# Altium PCB PCB3.0.PcbDoc (part 1 of 4)
Units mm, origin at the board's own origin, x right, y up, seen from the top; angles counter-clockwise.
Board outline 152.4 x 101.6 mm, 4 copper layers (Top Layer, Mid-Layer 1, Mid-Layer 2, Bottom Layer); 260 components, 503 nets, 1711 pads, 919 vias.
Unrouted connection lines stored in the file: 79.
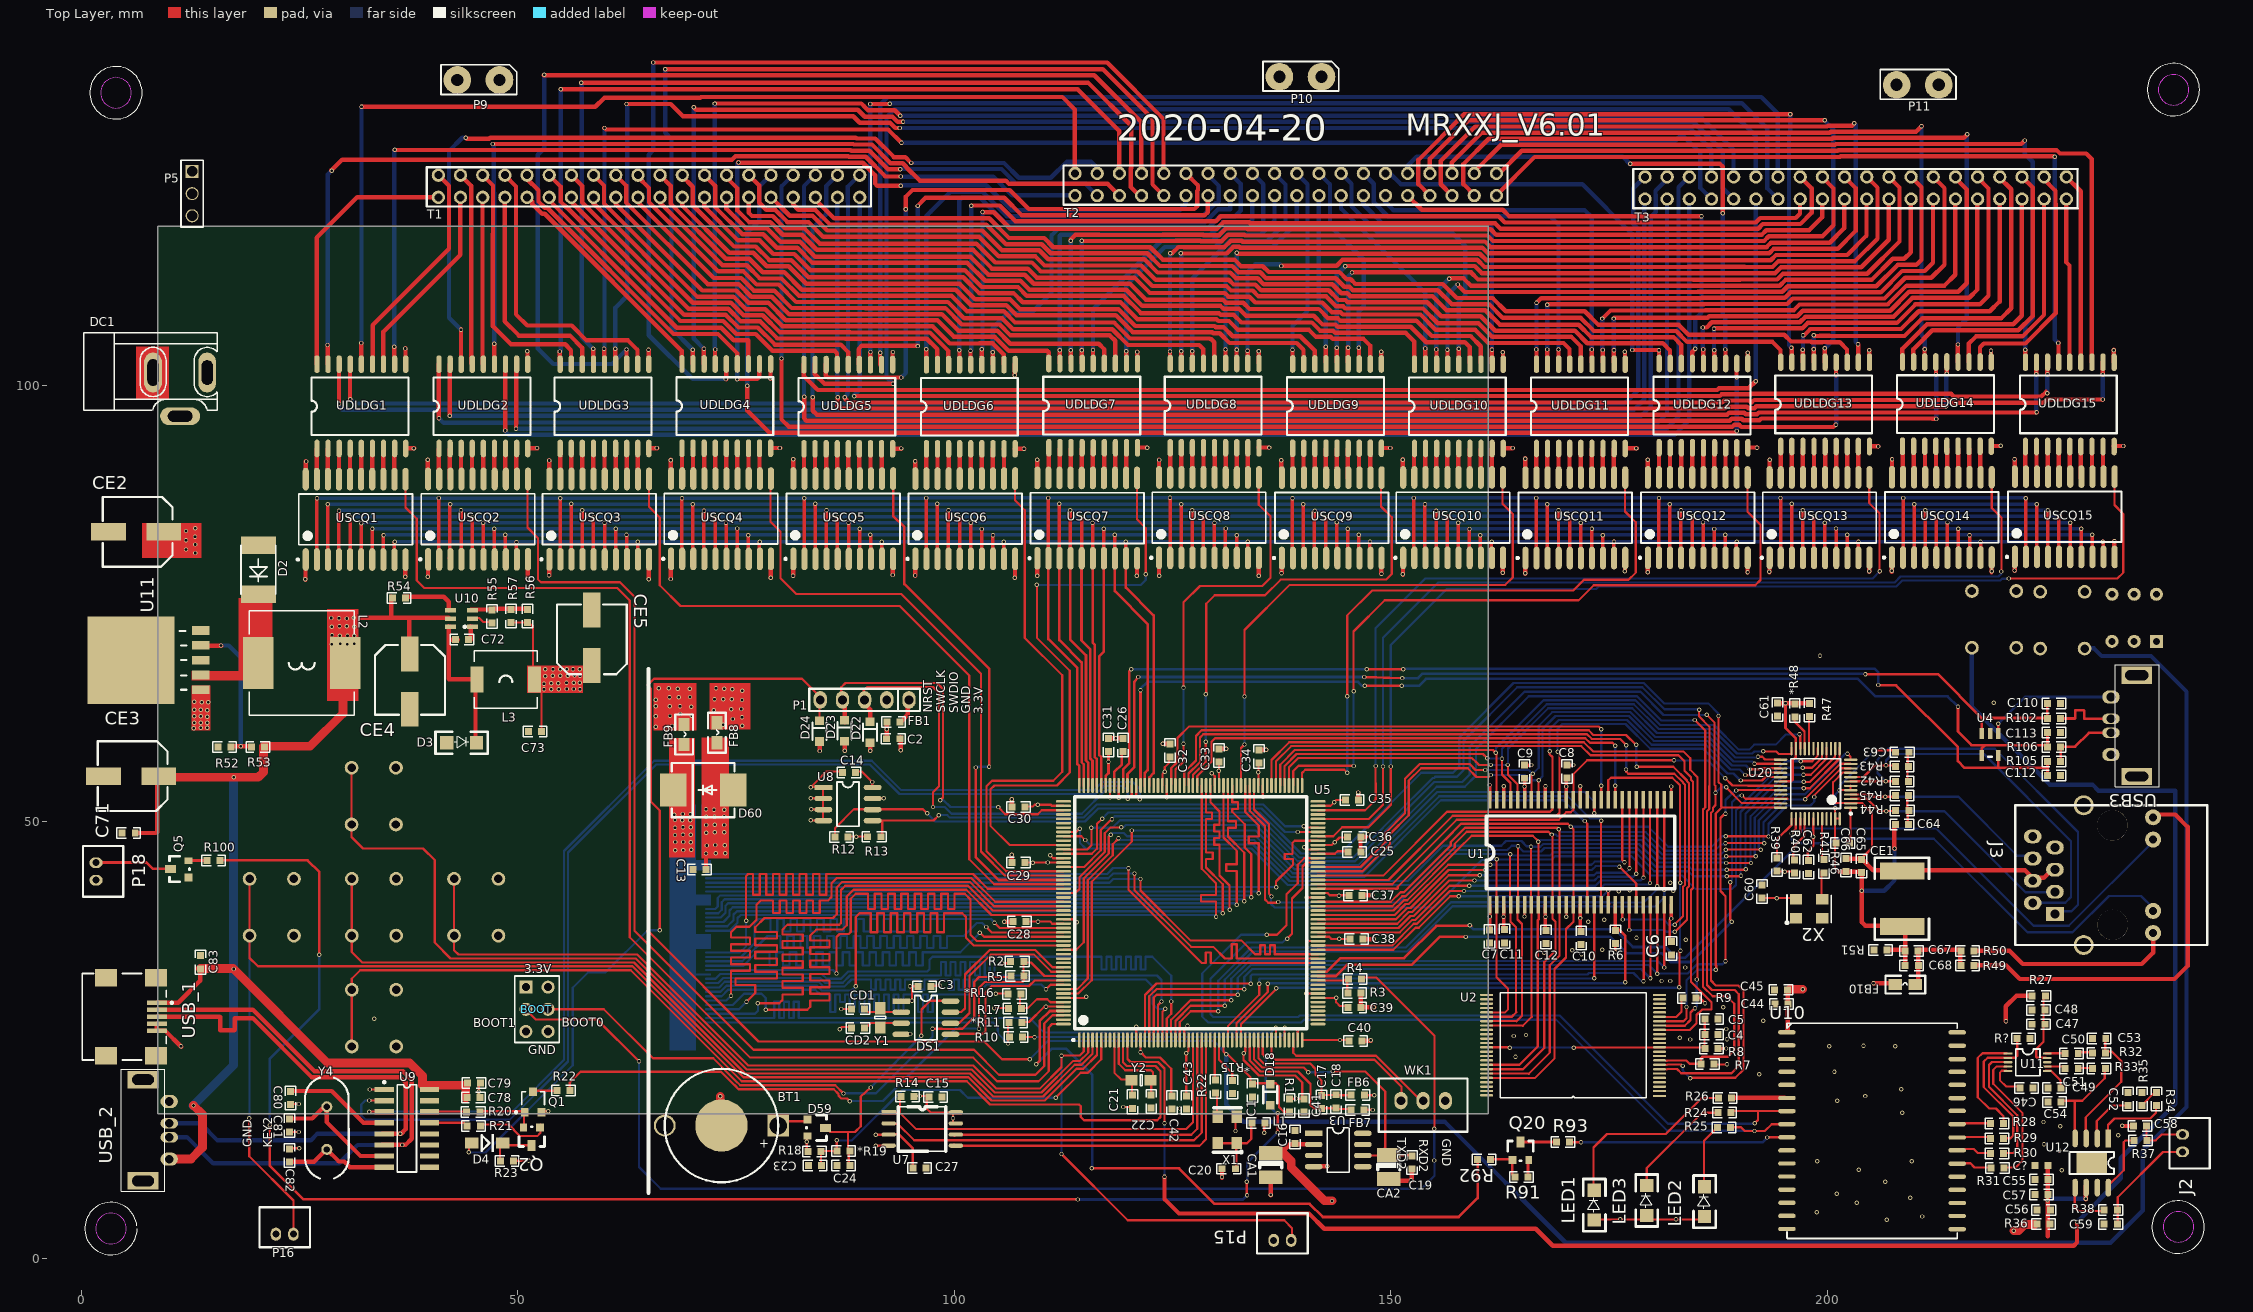
[diagram p0: Top Layer view]
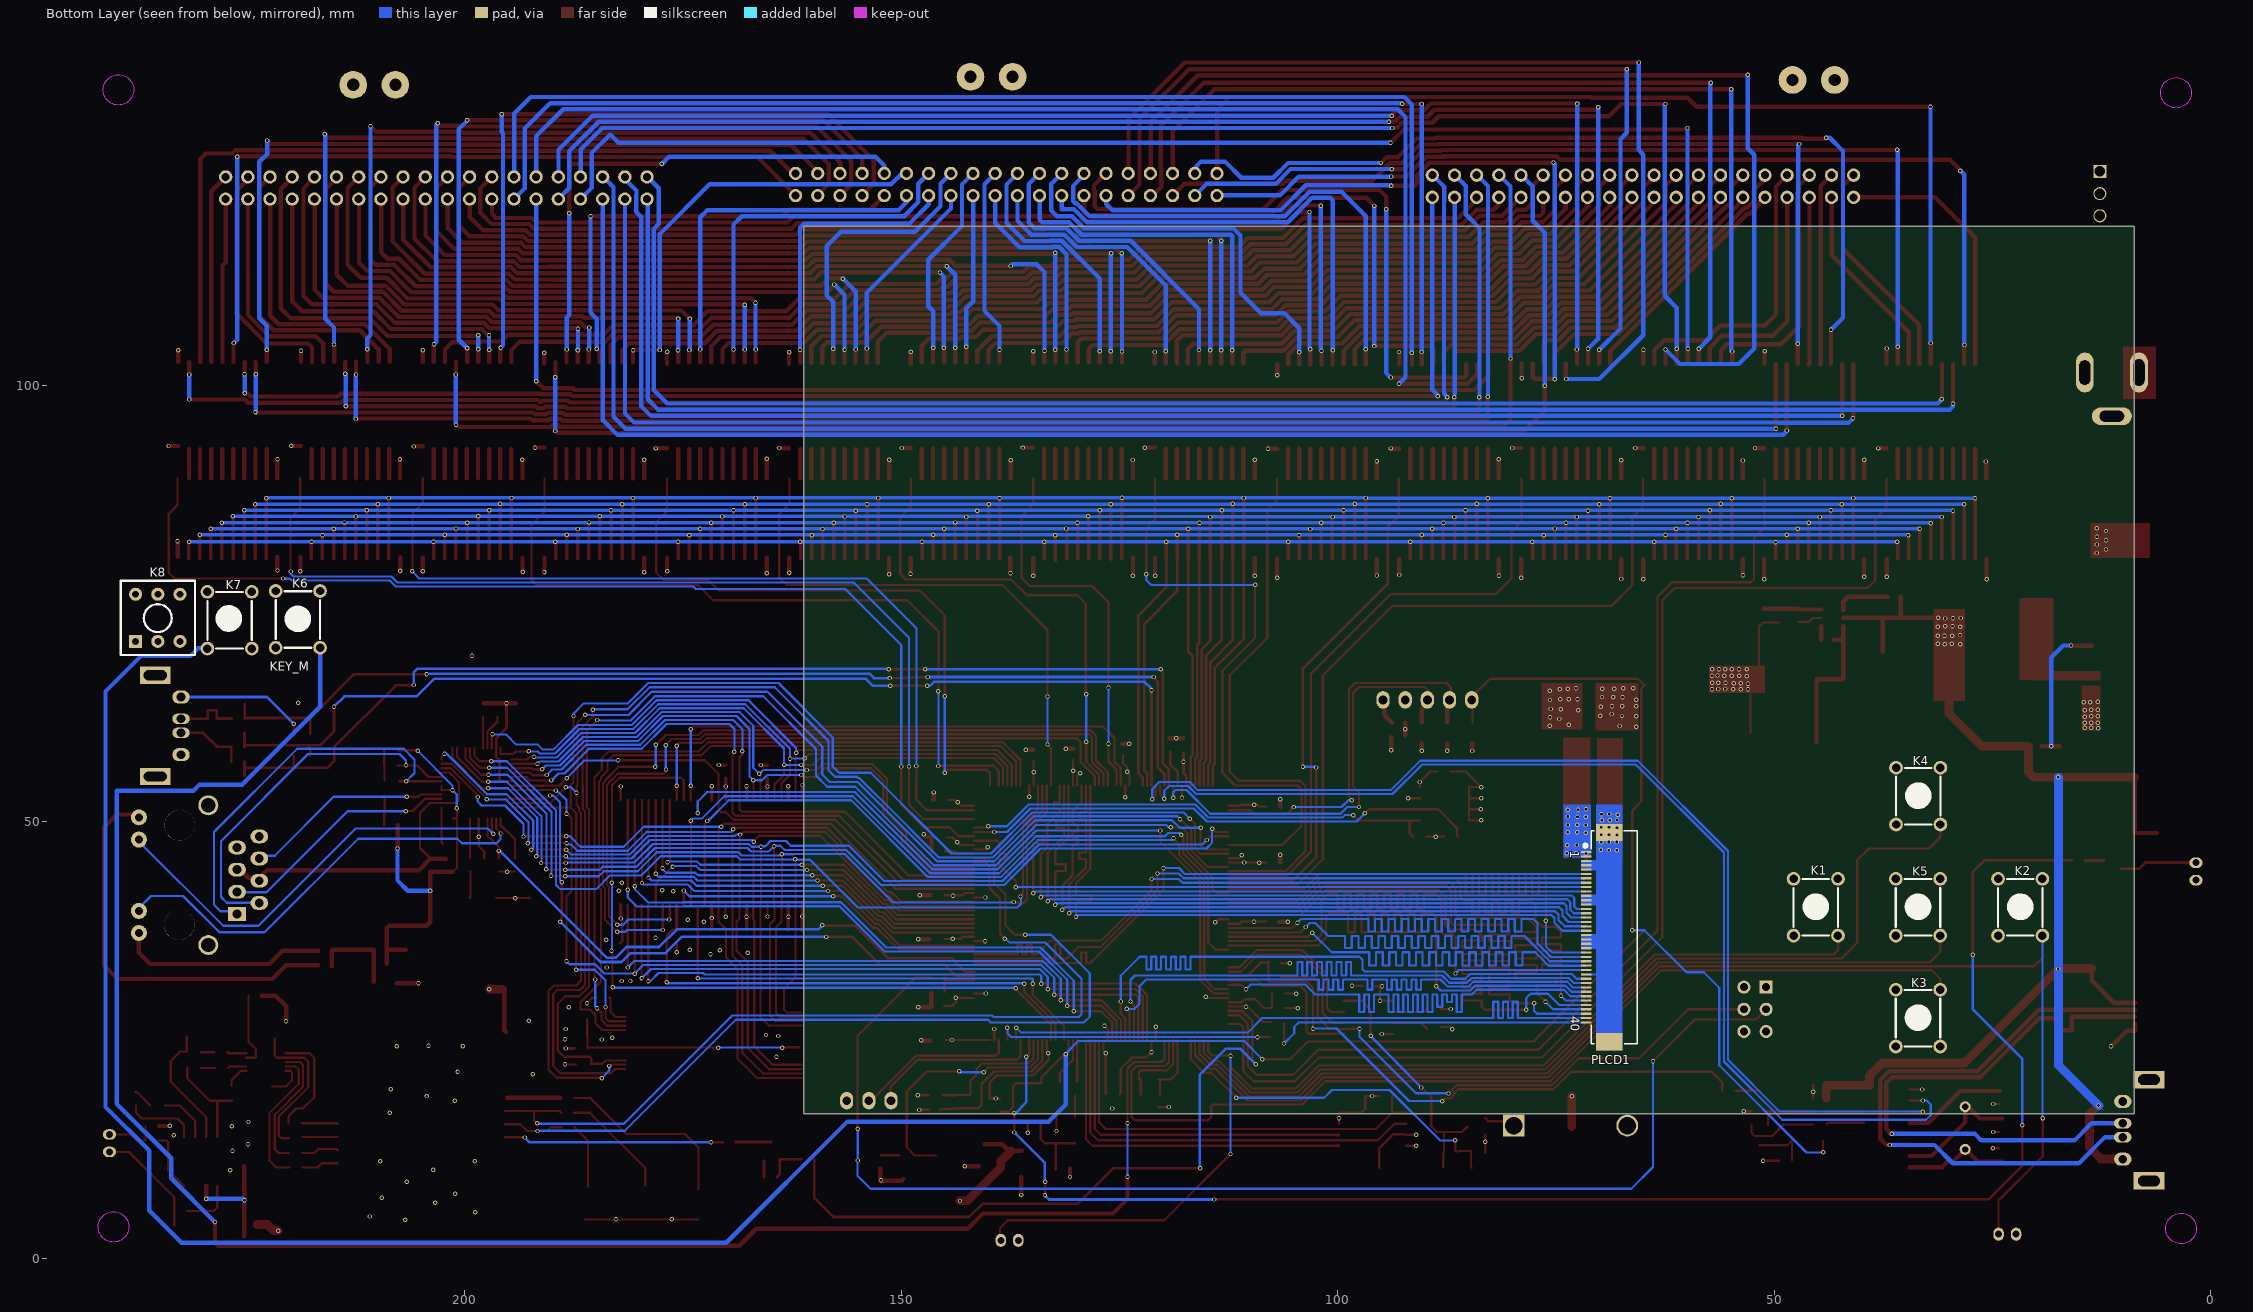
[diagram p1: Bottom Layer view, seen from below]
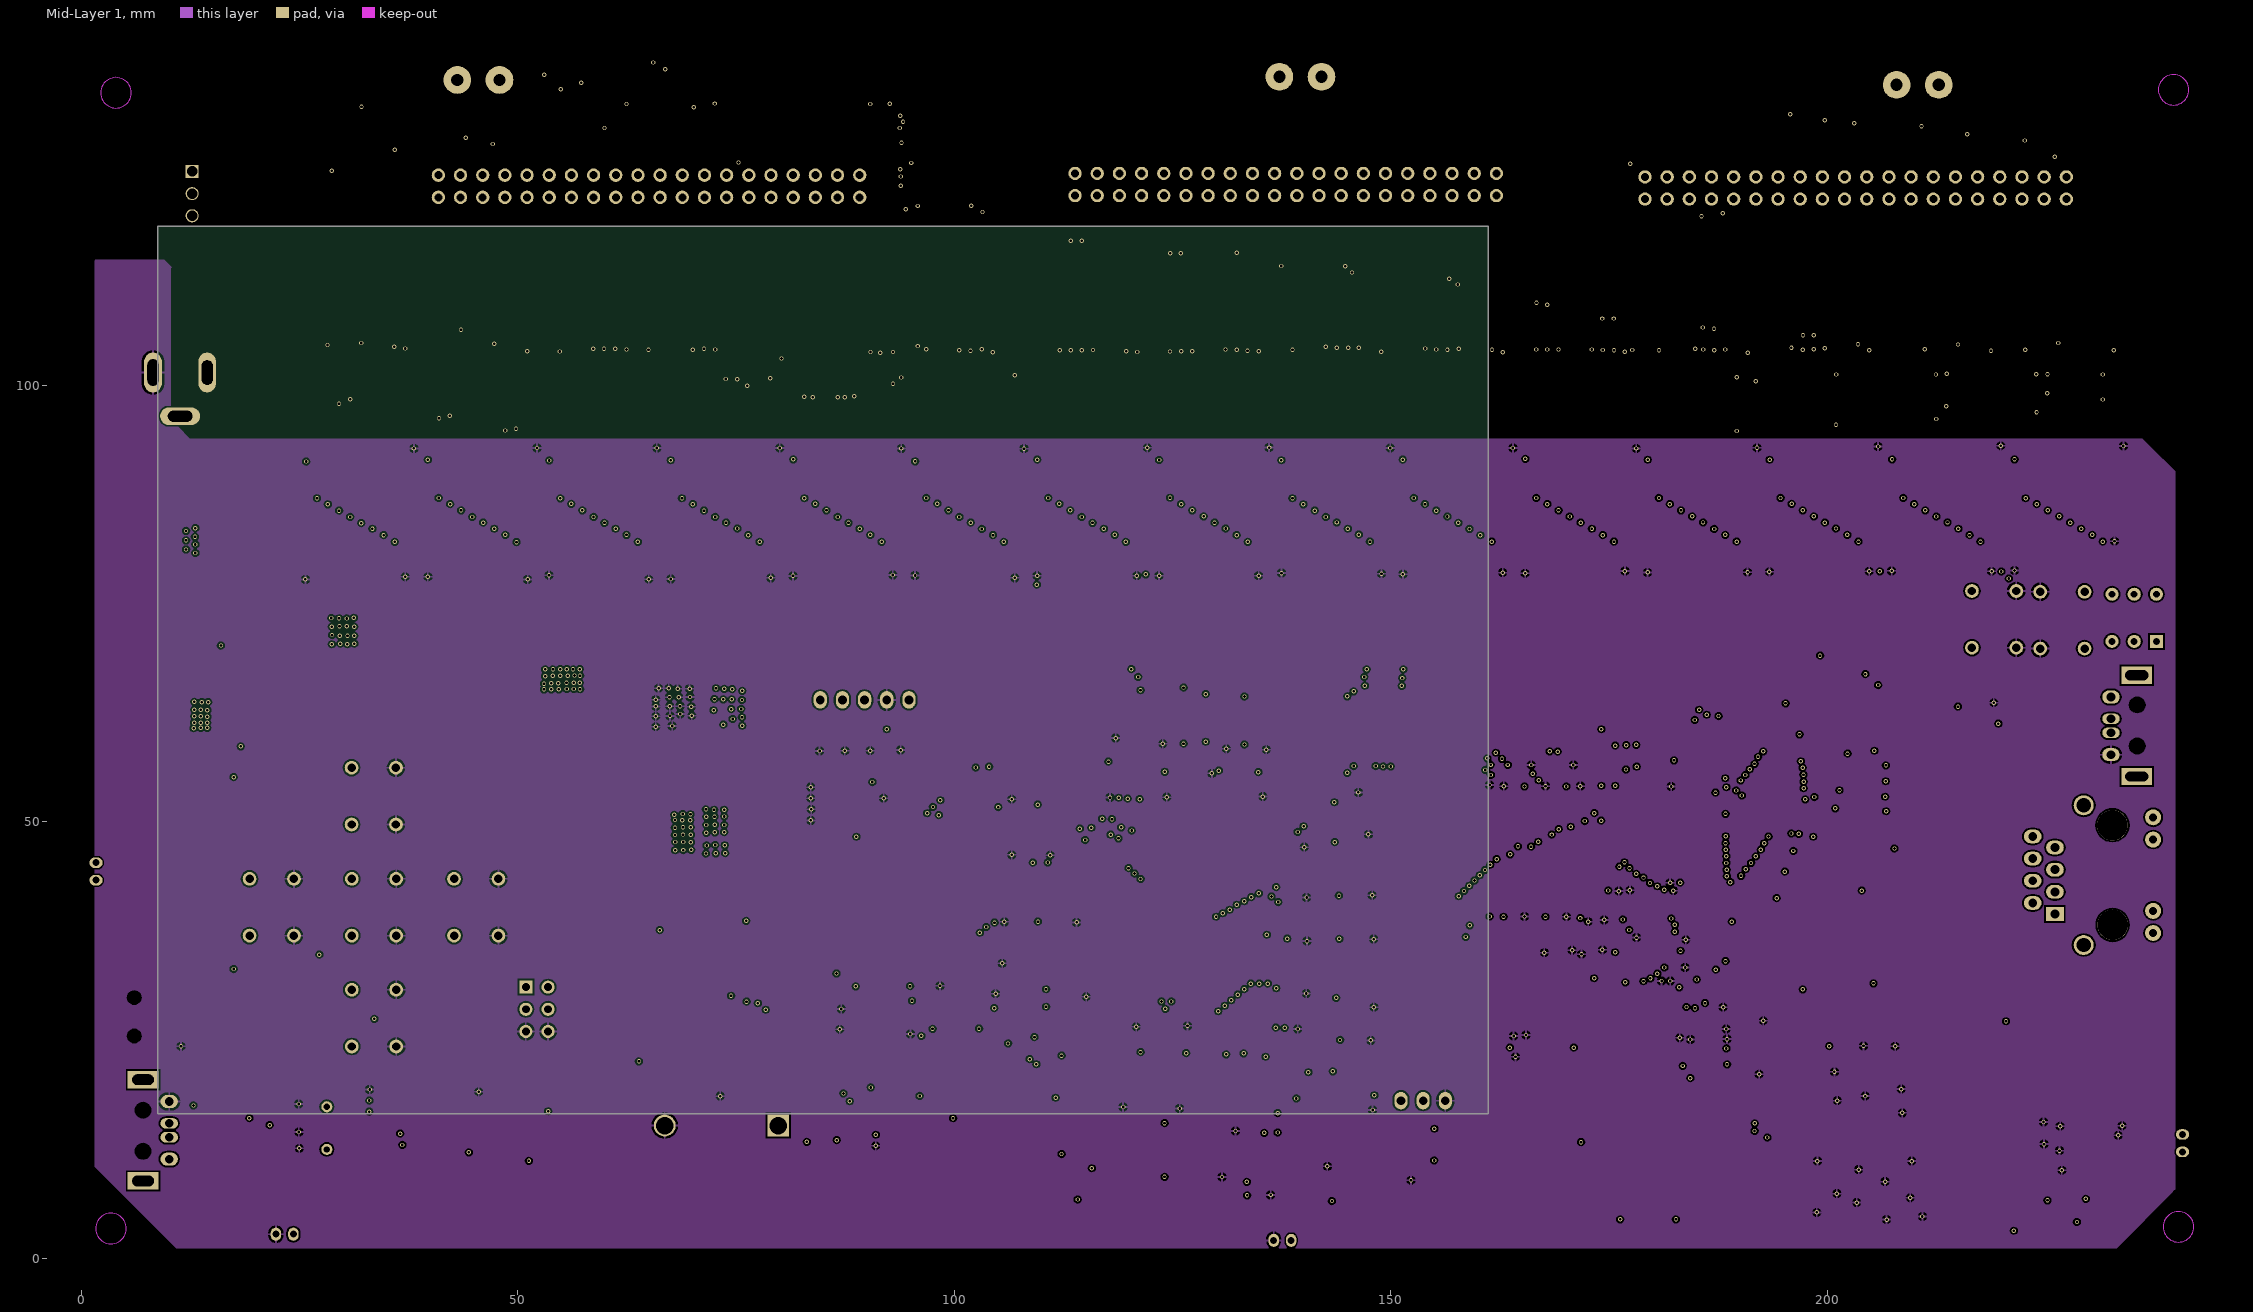
[diagram p2: Mid-Layer 1]
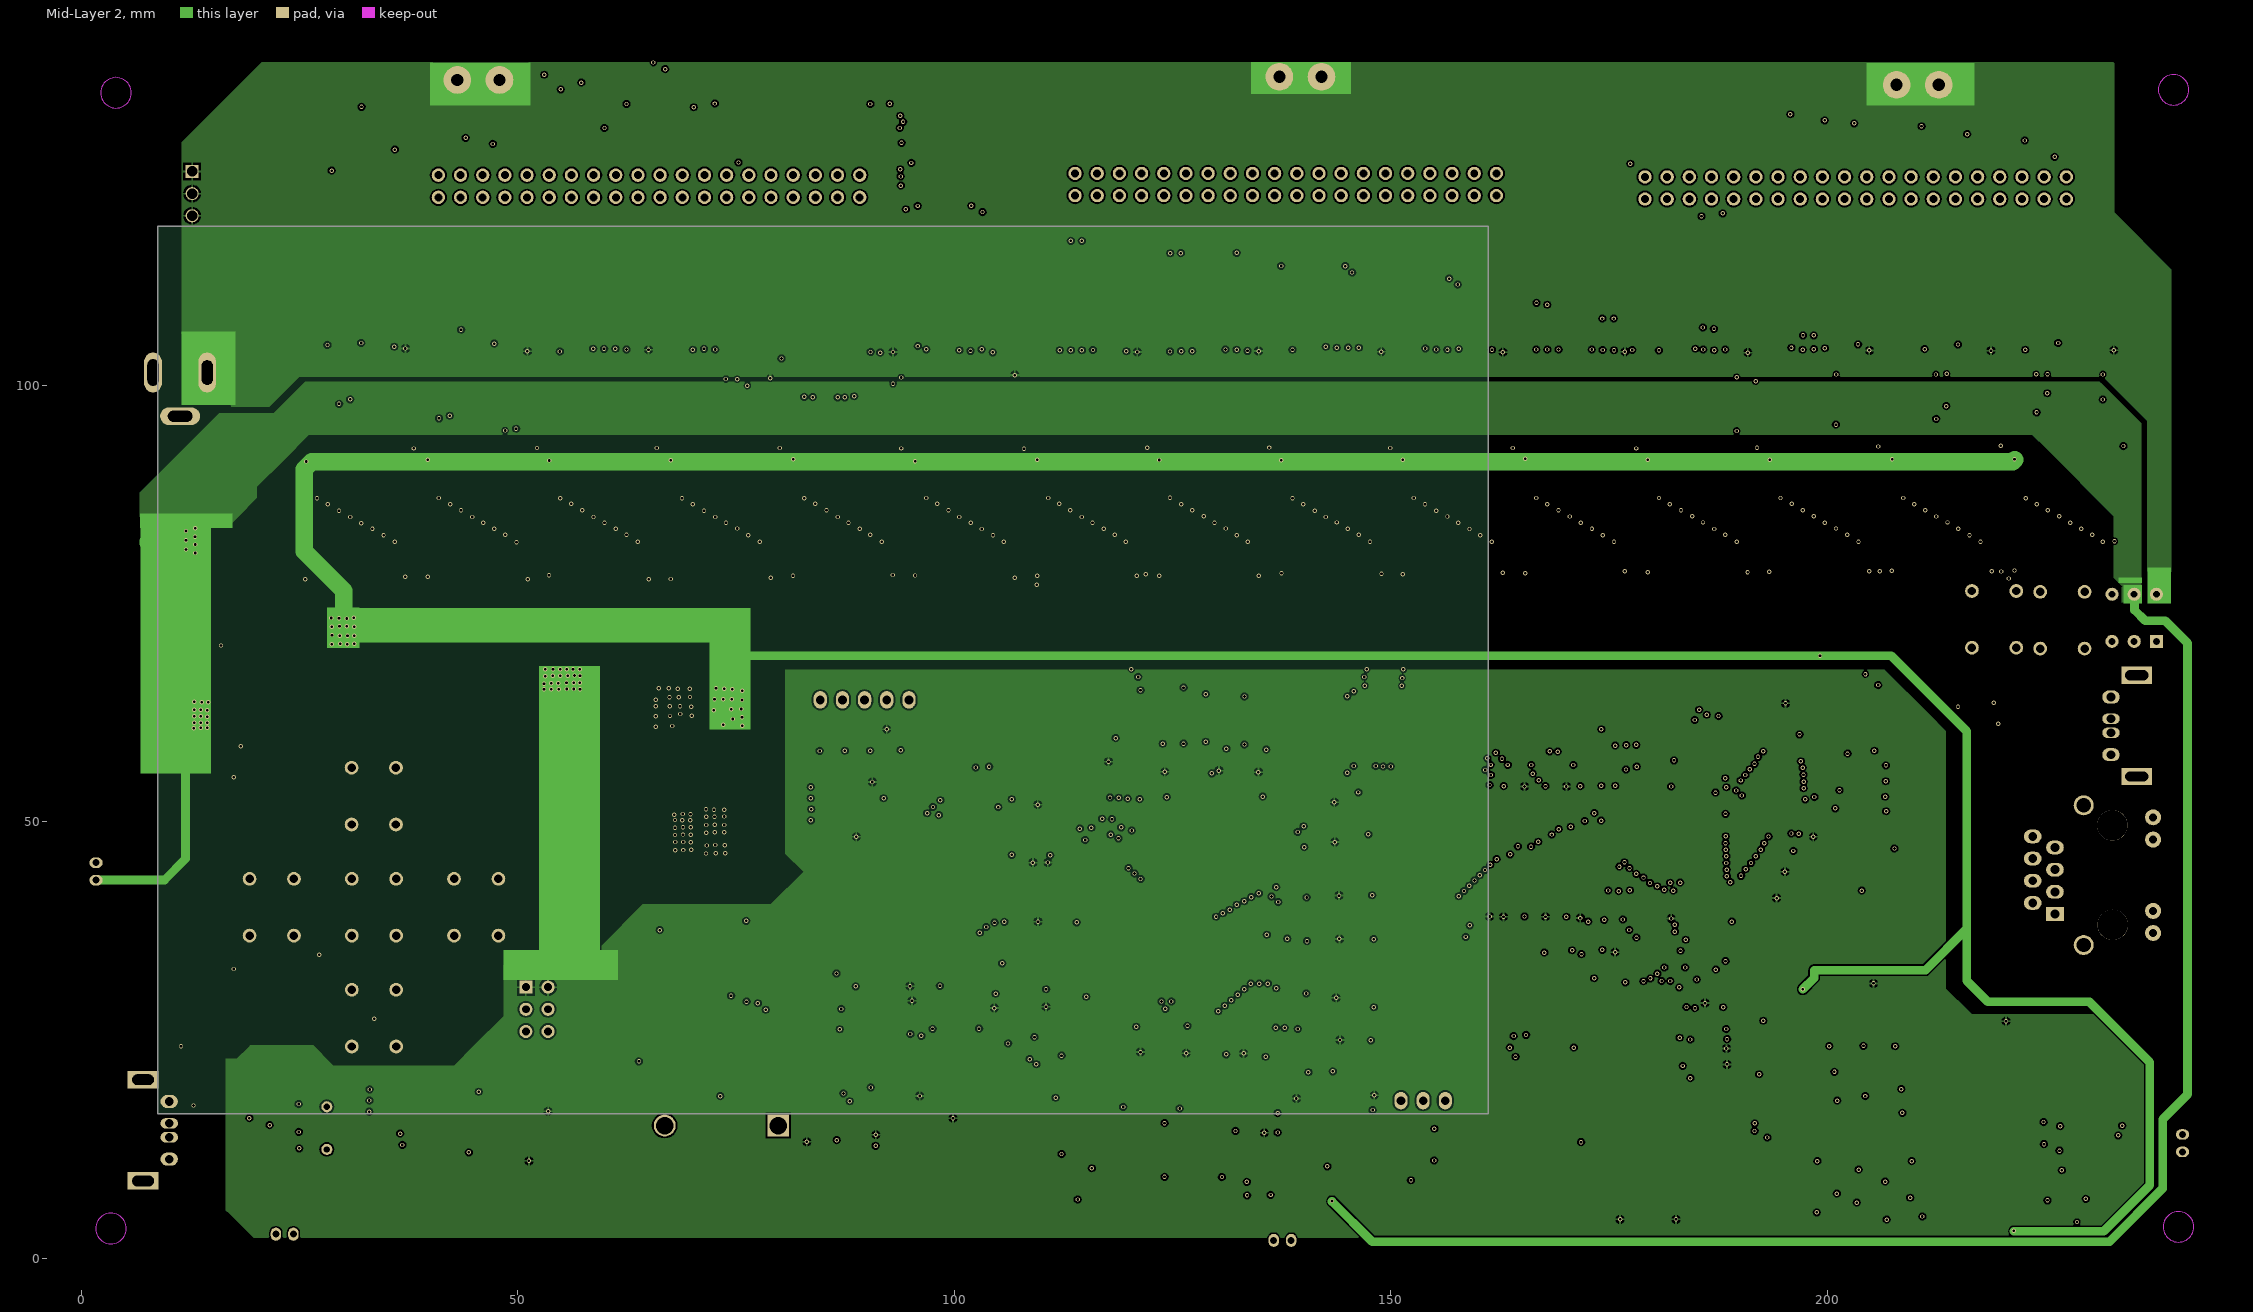
[diagram p3: Mid-Layer 2]

## Layer stack, top to bottom
Top Solder: solder mask 0.0102, Solder Resist, Dk 3.5
Top Layer: signal copper 0.0356
Dielectric 1: dielectric 0.32, FR-4, Dk 4.8
Mid-Layer 1: signal copper 0.0356
Dielectric3: dielectric 0.32, FR-4, Dk 4.8
Mid-Layer 2: signal copper 0.0356
Dielectric2: dielectric 0.32, FR-4, Dk 4.8
Bottom Layer: signal copper 0.0356
Bottom Solder: solder mask 0.0102, Solder Resist, Dk 3.5

## Board outline
8.8,16.575 161.2,16.575 161.2,118.175 8.8,118.175

## Design rules (kind name [scope] priority, off if disabled: settings)
Clearance [All] p1: gap=0.198
DiffPairsRouting [All] p1: maxlimit=0.3 minlimit=0.1 mostfreqgap=0.254 toplayer_prefgap=0.1 toplayer_minwidth=0.381 toplayer_maxwidth=0.381 toplayer_prefwidth=0.381 midlayer1_mingap=0.2 midlayer1_maxgap=0.254 midlayer1_minwidth=0.381 midlayer1_maxwidth=0.381 midlayer1_prefwidth=0.381 midlayer2_mingap=0.2 midlayer2_maxgap=0.254 midlayer2_minwidth=0.381 midlayer2_maxwidth=0.381 midlayer2_prefwidth=0.381 bottomlayer_prefgap=0.1 bottomlayer_minwidth=0.381 bottomlayer_maxwidth=0.381 bottomlayer_prefwidth=0.381 maxuncoupledlength=12.7
PolygonConnect [All] p1: connectstyle=Relief reliefconductorwidth=0.254 reliefentries=4 polygonreliefangle="90 Angle" airgapwidth=0.254
RoutingVias [All] p1: holewidth=0.3 width=0.5 viastyle="Through Hole" minholewidth=0.3 minwidth=0.5 maxholewidth=0.3 maxwidth=0.5
SolderMaskExpansion [All] p1: expansion=0.102
UnpouredPolygon [All] p1: allowunpoured=FALSE
Width [All] p1: maxlimit=5 minlimit=0.254 preferedwidth=0.254 minimp=50.000000 maximp=50.000000 favimp=50.000000
28 further rules are at their usual default settings.

## Components (designator, comment, footprint, x,y, rotation, side; value= is the part's Value field where it differs from the comment)
*R11 "0R" 0603R#1 107.775,26.975 r180 top (schematic designator R11)
*R15 "0R" 0603R#1 131.875,18.875 r90 top
*R16 "0R" 0603R#1 106.175,30.25 r0 top
*R19 "0R" 0603R#1 88.075,12.275 r180 top
*R48 "10K" 0603R#2 196.275,62 r90 top
BOOT "Header 3X2" HDR2X3 50.95,31.05 r270 top
BT1 "CR1220 3V" CR1220-1 73.35,15.2 r180 top
C1 "0.1uF" 0603C#1 134.2,18.475 r90 top
C2 "0.1uF" 0603C#1 93.775,59.5 r180 top
C3 "0.1uF" 0603C#1 97.35,31.15 r180 top
C4 "0.1uF" 0603C#1 187.475,25.625 r180 top
C5 "0.1uF" 0603C#1 187.5,27.375 r180 top
C6 "0.1uF" 0603C#1 182.175,34.75 r90 top
C7 "0.1uF" 0603C#1 161.3,36.1 r90 top
C8 "0.1uF" 0603C#1 170.175,56.5 r270 top
C9 "0.1uF" 0603C#1 165.325,56.475 r270 top
C10 "0.1uF" 0603C#1 171.825,35.925 r90 top
C11 "0.1uF" 0603C#1 163.025,36.125 r90 top
C12 "0.1uF" 0603C#1 167.775,36.05 r90 top
C13 "0.1uF" 0603C#1 70.075,44.5 r0 top
C14 "0.1uF" 0603C#1 87.2,55.65 r0 top
C15 "0.1uF" 0603C#1 98.625,18.475 r180 top
C16 "0.1uF" 0603C#1 139.025,14.625 r270 top
C17 "0.1uF" 0603C#1 142.1,17.15 r90 top
C18 "0.1uF" 0603C#1 143.75,17.225 r90 top
C19 "0.1uF" 0603C#1 152.425,10.225 r90 top
C20 "Cap S1" 0603C#1 132.2,10.25 r180 top
C21 "10P" 0603C#1 120.45,17.175 r90 top
C22 "10P" 0603C#1 122.575,18.7 r270 top
C23 "0.1uF" 0603C#1 84.825,10.6 r180 top
C24 "0.1uF" 0603C#1 86.6,10.625 r0 top
C25 "0.1uF" 0603C#1 146.625,46.525 r180 top
C26 "0.1uF" 0603C#1 119.325,58.025 r90 top
C27 "0.1uF" 0603C#1 96.8,10.35 r180 top
C28 "0.1uF" 0603C#1 106.725,38.55 r0 top
C29 "0.1uF" 0603C#1 106.625,45.3 r0 top
C30 "0.1uF" 0603C#1 106.625,51.675 r0 top
C31 "0.1uF" 0603C#1 117.7,59.55 r270 top
C32 "0.1uF" 0603C#1 124.725,58.9 r270 top
C33 "0.1uF" 0603C#1 130.35,58.325 r270 top
C34 "0.1uF" 0603C#1 134.925,58.225 r270 top
C35 "0.1uF" 0603C#1 146.325,52.475 r180 top
C36 "0.1uF" 0603C#1 146.575,48.225 r180 top
C37 "0.1uF" 0603C#1 146.725,41.55 r180 top
C38 "0.1uF" 0603C#1 146.825,36.55 r180 top
C39 "0.1uF" 0603C#1 146.625,28.725 r180 top
C40 "0.1uF" 0603C#1 146.725,24.9 r180 top
C41 "0.1uF" 0603C#1 140.05,16.725 r90 top
C42 "0.1uF" 0603C#1 124.975,17.1 r90 top
C43 "0.1uF" 0603C#1 126.625,17.075 r90 top
C44 "Cap S1" 0603C#1 194,29.125 r0 top
C45 "Cap S1" 0603C#1 193.975,30.75 r0 top
C46 "Cap S1" 0603C#1 223.575,19.5 r180 top
C47 "Cap S1" 0603C#1 223.45,26.8 r0 top
C48 "Cap S1" 0603C#1 223.45,28.425 r0 top
C49 "Cap S1" 0603C#1 225.275,19.525 r0 top
C50 "Cap S1" 0603C#1 227.25,23.425 r0 top
C51 "Cap S1" 0603C#1 227.25,21.75 r0 top
C52 "Cap S1" 0603C#1 234.425,19 r270 top
C53 "1nF" 0603C#1 231.9,25.175 r180 top
C54 "1nF" 0603C#1 226.775,17.875 r180 top
C55 "Cap S1" 0603C#1 223.775,9 r0 top
C56 "Cap S1" 0603C#1 224.05,5.55 r0 top
C57 "Cap S1" 0603C#1 223.775,7.325 r0 top
C58 "Cap S1" 0603C#1 235.05,15.125 r0 top
C59 "Cap S1" 0603C#1 231.725,3.9 r0 top
C60 "0.1uF" 0603C#1 192.55,42.775 r270 top
C61 "10uF" 0603C#1 194.325,62.1 r90 top
C62 "0.1uF" 0603C#1 197.875,44.075 r90 top
C63 "0.1uF" 0603C#2 207.85,57.95 r0 top
C64 "0.1uF" 0603C#2 207.8,49.675 r0 top
C65 "0.1uF" 0603C#1 203.95,44.175 r90 top
C66 "0.1uF" 0603C#1 202.125,44.3 r90 top
C67 "1uF" 0603C#1 208.9,35.2 r0 top
C68 "0.1uF" 0603C#1 208.925,33.55 r0 top
C71 "" 0603C#2 6.2,48.725 r180 top
C72 "" 0603C#2 42.875,70.875 r0 top
C73 "" 0603C#1 52.75,60.35 r180 top
C78 "104" 0603C#1 44.2,18.4 r0 top
C79 "104" 0603C#1 44.25,20.075 r0 top
C80 "104" 0603C#1 23.975,17.6 r90 top
C81 "22" 0603C#1 23.9,14.475 r90 top
C82 "22" 0603C#1 23.875,12.525 r270 top
C83 "104" 0603C#1 13.675,34.65 r270 top
C110 "5pF" 0603C#1 225.2,63.525 r0 top
C112 "5pF" 0603C#1 225.2,55.275 r0 top
C113 "NC" 0603C#1 225.225,60.2 r0 top
C? "CAP1" 0603C-1 225.3,10.625 r180 top
CA1 "47uF/16V" C1210 136.275,10.675 r270 top
CA2 "47uF/16V" C1210 149.775,10.45 r270 top
CD1 "10P" 0603C#1 88.225,28.55 r0 top
CD2 "10P" 0603C#1 88.25,26.35 r0 top
CE1 "220UF/16V" 2220 208.6,44.35 r270 top
CE2 "220uF/35V" C-0808-S 9.475,83.2 r0 top
CE3 "220uF/35V" C-0808-S 8.9,55.225 r0 top
CE4 "220uF/35V" C-0808-S 37.675,69.225 r90 top
CE5 "220uF/35V" C-0808-S 58.5,67.9 r270 top
D2 "" DO-214AA 20.3,81.675 r270 top
D3 "" 1206D-N 41.875,59.05 r0 top
D4 "1N4148" DIODE_SOP 44.75,13.2 r0 top
D18 "LTE32C05L01LC" SOD-323 136.2,18.725 r270 top
D22 "LTE32C05L01LC" SOD-323 90.375,60.25 r270 top
D23 "LTE32C05L01LC" SOD-323 87.45,60.425 r270 top
D24 "LTE32C05L01LC" SOD-323 84.575,60.375 r270 top
D59 "BAT54C/KL3" SOT-23 83.225,15.9 r270 top
D60 "SMAJ6.0A" DO-214AB 71.25,53.625 r0 top
DC1 "DC-005-25A" DC10B 3.8,97.125 r0 top
DS1 "ds1302" SO-8N 93.95,29.45 r0 top (schematic designator DS4)
FB1 "120 OHM/2A@100MHz/NC" SL0603 93.825,61.425 r180 top
FB6 "120 OHM/2A@100MHz/NC" SL0603 146.975,18.675 r180 top
FB7 "120 OHM/2A@100MHz/NC" SL0603 146.95,17 r180 top
FB8 "120 OHM/3A@100MHz" SL0805 72.825,61.325 r270 top
FB9 "120 OHM/3A@100MHz" SL0805 69.075,61.125 r270 top
FB10 "BLM21RK102SN1" 0805L-1 207.8,31.35 r0 top
J2 "HEADER2" CON-2-2.0 240.7,12.175 r90 top
J3 "HR911105A" HR911105A 226.075,39.425 r0 top
K1 "KEY_M" KEY_M 47.803,36.951 r90 bottom locked
K2 "KEY_M" KEY_M 24.384,36.951 r90 bottom locked
K3 "KEY_M" KEY_M 36.093,24.251 r90 bottom locked
K4 "KEY_M" KEY_M 36.068,49.679 r90 bottom locked
K5 "KEY_M" KEY_M 36.093,36.951 r90 bottom locked
K6 "KEY_M" KEY_M 221.65,69.925 r90 bottom
K7 "KEY_M" KEY_M 229.475,69.825 r90 bottom
K8 "KEY_M" BTN8.5*8.5 237.7,70.65 r90 bottom
L1 "100R" 0603R#1 135.6,15.5 r180 top
L2 "" L1270 25.275,68.175 r180 top
L3 "" L0630 48.65,66.3 r0 top
LED1 "" 1206D-N 173.325,4.375 r90 top
LED2 "" 1206D-N 185.95,4.775 r90 top
LED3 "" 1206D-N 179.325,4.9 r90 top
P1 "SWD" CON5_2.5_1 94.825,63.95 r180 top
P5 "Header 3" HDR1X3 12.725,124.475 r270 top
P9 "CON2" N1A 43.1,134.95 r270 top
P10 "CON2" N1A 137.25,135.325 r270 top
P11 "CON2" N1A 207.95,134.4 r270 top
P15 "CON2" CON-2-2.0 138.6,2.05 r180 top
P16 "CON2" CON-2-2.0 24.325,2.75 r180 top
P18 "CON2" CON-2-2.0 1.725,43.3 r90 top
PLCD1 "FPC-40" FPC-TOP40 71.575,46.512 r270 bottom locked
Q1 "S8550" SOT-23R 51.775,17.775 r0 top
Q2 "S8050" SOT-23A 52.575,14.95 r180 top
Q5 "S8050" SOT-23A 12.3,43.625 r90 top
Q20 "2SC8550" SOT-23A 163.925,11.275 r0 top
R1 "10K" 0603R#1 138.4,18.225 r270 top
R2 "10K" 0603R#1 106.475,33.975 r0 top
R3 "10K" 0603R#1 146.6,30.375 r180 top
R4 "10K" 0603R#1 146.65,32 r180 top
R5 "10K" 0603R#1 108,32.35 r180 top (schematic designator R7)
R6 "10K" 0603R#1 175.725,37.525 r270 top
R7 "10K" 0603R#1 185.55,22.25 r0 top
R8 "0R" 0603R#1 186,24 r0 top
R9 "10K" 0603R#1 183.475,29.8 r0 top
R10 "0R" 0603R#1 107.825,25.325 r180 top (schematic designator *R10)
R12 "10K" 0603R#1 87.85,48.25 r180 top
R13 "10K" 0603R#1 90.1,48.275 r0 top
R14 "10K" 0603R#1 95.4,18.525 r180 top
R17 "0R" 0603R#1 106.225,28.6 r0 top
R18 "0R" 0603R#1 83.275,12.225 r0 top
R20 "1K" 0603R#1 44.175,16.775 r0 top
R21 "1K" 0603R#1 44.225,15.15 r0 top
R22 "R1-S" 0603R#1 129.95,18.925 r90 top
R22 "1K" 0603R#1 54.525,19.225 r0 top
R23 "10K" 0603R#1 49.525,11.15 r180 top
R24 "R1-S" 0603R#1 188.975,16.675 r180 top
R25 "R1-S" 0603R#1 188.925,15 r180 top
R26 "R1-S" 0603R#1 189.025,18.35 r180 top
R27 "R1-S" 0603R#1 223.475,30.05 r0 top
R28 "R1-S" 0603R#1 218.675,15.45 r0 top
R29 "R1-S" 0603R#1 218.7,13.725 r0 top
R30 "R1-S" 0603R#1 218.7,11.975 r0 top
R31 "R1-S" 0603R#1 218.75,10.325 r0 top
R32 "33R" 0603R#1 230.375,23.525 r0 top
R33 "33R" 0603R#1 230.375,21.725 r0 top
R34 "R1-S" 0603R#1 237.7,18.975 r270 top
R35 "R1-S" 0603R#1 236.075,19 r270 top
R36 "R1-S" 0603R#1 225.525,3.9 r180 top
R37 "R1-S" 0603R#1 235.125,13.5 r0 top
R38 "R1-S" 0603R#1 231.725,5.525 r0 top
R39 "10K" 0603R#2 194.225,44.35 r90 top
R40 "10K" 0603R#2 196.225,44.125 r90 top
R41 "51Ω" 0603R#2 199.625,45.65 r270 top
R42 "49.9 1%" 0603R#2 209.3,54.6 r180 top
R43 "49.9 1%" 0603R#2 209.325,56.325 r180 top
R44 "49.9 1%" 0603R#2 209.35,51.3 r180 top
R45 "49.9 1%" 0603R#2 209.3,52.975 r180 top
R46 "6.8K 1%" 0603R#2 201.025,47.55 r0 top
R47 "10K" 0603R#2 197.95,62.025 r90 top
R49 "1K" 0603R#2 216.825,33.5 r180 top
R50 "1K" 0603R#2 216.8,35.175 r180 top
R51 "000" 0603R#2 206.85,35.3 r180 top
R52 "" 0603R#1 17.175,58.55 r180 top
R53 "" 0603R#1 19.5,58.575 r0 top
R54 "" 0603R#1 37.15,75.625 r180 top
R55 "" 0603R#1 47.075,74.25 r270 top
R56 "" 0603R#1 51.15,72.8 r90 top
R57 "" 0603R#1 49.25,72.8 r90 top
R91 "R1-S" 0603R#1 164.225,9.3 r0 top
R92 "R1-S" 0603R#1 161.45,11.325 r180 top
R93 "R1-S" 0603R#1 168.975,13.3 r0 top
R100 "R1-S" 0603R#1 15.925,45.55 r180 top
R102 "22R" 0603R#1 225.2,61.825 r0 top
R105 "22R" 0603R#1 225.225,56.9 r0 top
R106 "1.5K" 0603R#1 225.225,58.55 r0 top
R? "R1-S" 0603R#1 223.225,25.175 r180 top
T1 "dubangxian" 杜邦线插脚 40.925,124.05 r0 top
T2 "dubangxian" 杜邦线插脚 113.85,124.25 r0 top
T3 "dubangxian" 杜邦线插脚 179.125,123.85 r0 top
U1 "W9825G6KH-6" TSOP54 161.327,40.487 r90 top locked (schematic designator U3)
U2 "MT29F4G08" TSOP48 180.8,18.65 r180 top (schematic designator U4)
U3 "REF196ES" SO-8N 141.175,14.3 r0 top
U4 "SP0504" SOT-25A 219.6,60.1 r0 top
U5 "STM32F429B" STM32F429_LQFP208 127.101,39.572 r90 top locked
U7 "W25Q256" SOP8-K 96.475,14.675 r0 top (schematic designator U2)
U8 "24C02" SO-8N 85.025,53.925 r0 top
U9 "CH340G" SOP16M 37.325,14.875 r270 top
U10 "HK4002" HK4002 195.375,25.875 r0 top
U10 "MP2359" SOT-26A 44.85,72.325 r270 top
U11 "LM2576" TO-263 13.725,65.1 r90 top
U11 "CS4344-CZZ" TSSOP-10 220.7,23.45 r0 top
U12 "ANT8110S" SOP-8NT 232.2,13.725 r270 top
U20 "DM9000AE" DM9000AE 202.7,51.6 r180 top
UDLDG1 "uln2803" sol-18 27.025,92.75 r90 top
UDLDG2 "uln2803" sol-18 41,92.75 r90 top
UDLDG3 "uln2803" sol-18 54.875,92.75 r90 top
UDLDG4 "uln2803" sol-18 68.825,92.775 r90 top
UDLDG5 "uln2803" sol-18 82.8,92.7 r90 top
UDLDG6 "uln2803" sol-18 96.825,92.7 r90 top
UDLDG7 "uln2803" sol-18 110.85,92.825 r90 top
UDLDG8 "uln2803" sol-18 124.75,92.825 r90 top
UDLDG9 "uln2803" sol-18 138.775,92.775 r90 top
UDLDG10 "uln2803" sol-18 152.725,92.75 r90 top
UDLDG11 "uln2803" sol-18 166.7,92.75 r90 top
UDLDG12 "uln2803" sol-18 180.75,92.825 r90 top
UDLDG13 "uln2803" sol-18 194.675,92.975 r90 top
UDLDG14 "uln2803" sol-18 208.625,93 r90 top
UDLDG15 "uln2803" sol-18 222.7,92.975 r90 top
USB3 "USB30" USB/20-1 233,67.975 r270 top
USB_1 "USB" USB/SM0.8-6H5 8.7,29.25 r180 top
USB_2 "USB30" USB/30 9.6,7.65 r90 top
USCQ1 "74HC573" SO20_M 31.45,84.625 r90 top
USCQ2 "74HC573" SO20_M 45.475,84.65 r90 top
USCQ3 "74HC573" SO20_M 59.35,84.65 r90 top
USCQ4 "74HC573" SO20_M 73.3,84.7 r90 top
USCQ5 "74HC573" SO20_M 87.3,84.7 r90 top
USCQ6 "74HC573" SO20_M 101.275,84.7 r90 top
USCQ7 "74HC573" SO20_M 115.25,84.775 r90 top
USCQ8 "74HC573" SO20_M 129.2,84.825 r90 top
USCQ9 "74HC573" SO20_M 143.25,84.8 r90 top
USCQ10 "74HC573" SO20_M 157.15,84.825 r90 top
USCQ11 "74HC573" SO20_M 171.15,84.8 r90 top
USCQ12 "74HC573" SO20_M 185.175,84.825 r90 top
USCQ13 "74HC573" SO20_M 199.125,84.825 r90 top
USCQ14 "74HC573" SO20_M 213.125,84.85 r90 top
USCQ15 "74HC573" SO20_M 227.2,84.925 r90 top
WK1 "Header 3" CON-3-2.5 151.175,18.05 r0 top
X1 "XTAL_SM" X5032-1 131.275,14.7 r90 top
X2 "25MHZ" X5032-1 197.925,40.025 r0 top
Y1 "32768hz" XTAL-3215 91.55,26.425 r90 top (schematic designator Y2)
Y2 "32.768KHZ" XTAL-3215 120.3,20.375 r0 top (schematic designator Y1)
Y4 "12.288MHz" XTAL_US 28.15,17.35 r270 top

## Footprints (in the part's own frame and the unit in brackets; to place one, negate y for a bottom-side part, rotate by r counter-clockwise, add the part's x,y. Pads: shape width x height; smd on the part's side, far side on the other; paste and mask are expansions set on the pad)
0603C#1 [mm]
  rect 0.8x0.8 smd: 1(0,0) 2(1.5,0)
  silkscreen extent -0.6,-0.6 2.1,0.6
0603C#2 [mm]
  rect 0.8x0.8 smd: 1(-0.009,0.004) 2(1.491,0.004)
  silkscreen extent -0.61,-0.6 2.09,0.6
0603C-1 [mm]
  rect 0.8x0.8 smd: 1(0,0) 2(1.5,0)
0603R#1 [mm]
  rect 0.8x0.8 smd: 1(0,0) 2(1.5,0)
  silkscreen extent -0.6,-0.6 2.1,0.6
0603R#2 [mm]
  rect 0.8x0.8 smd: 1(0.005,-0.005) 2(1.505,-0.005)
  silkscreen extent -0.6,-0.61 2.1,0.59
0805L-1 [mil]
  rect 60x50 smd: 1(0,0) 2(90,0)
  silkscreen extent -45,-40 135,40
1206D-N [mil]
  rect 60x60 smd: 1(0,0) 2(135,0)
  silkscreen extent -50,-50 185,50
2220 [mm]
  rect 1.905x5.08 smd: 1(0,0) 2(6.35,0)
  silkscreen extent -1.52,-3.18 7.87,3.05
BTN8.5*8.5 [mm]
  rect 1.5x1.5 hole 0.8: 1(0,0)
  round 1.5 hole 0.8: 2(0,-2.54) 3(0,-5.08) 4(5.4,-5.08) 5(5.4,-2.54) 6(5.4,0)
  silkscreen extent -1.55,-6.79 6.95,1.71
C1210 [mm]
  rect 1.6x2.7 smd: 1(-1.4,0) 2(1.4,0)
  silkscreen extent -0.3,-1.25 0.3,1.25
C-0808-S [mm]
  rect 4x2 smd: 1(0,0) 2(-6.35,0)
  silkscreen extent -6.98,-4 1.02,4
CON5_2.5_1 [mm]
  oval 1.524x2 hole 1: 1(0,0) 2(2.54,0) 3(5.08,0) 4(7.62,0) 5(10.16,0)
  silkscreen extent -1.27,-1.27 11.43,1.27
CON-2-2.0 [mm]
  oval 1.2x1.5 hole 0.8: 1(0,0) 2(2,0)
  silkscreen extent -1.91,-3.1 3.9,1.5
CON-3-2.5 [mm]
  oval 1.5x2 hole 1: 1(0,0) 2(2.54,0) 3(5.08,0)
  silkscreen extent -2.54,-3.56 7.62,2.54
CR1220-1 [mm]
  rect 2.5x2.5 hole 2: 1(-6.5,0)
  round 2.5 hole 2: 1(6.5,0)
  round 6 smd: 2(0,0)
  silkscreen extent -6.5,-6.5 6.5,6.5
DC10B [mil]
  oval 80x180 hole 50 slot 110 at 90 deg: 1(419.09,170)
  oval 80x180 hole 50 slot 120 at 90 deg: 2(175,170)
  oval 180x80 hole 50 slot 110 at 0 deg: 3(297.05,-26.85)
  silkscreen extent -138,0 465,350
DIODE_SOP [mm]
  rect 1.5x1.3 smd: 1(0,0) 2(3.556,0)
  silkscreen extent 1.14,-1.02 2.56,1.02
DM9000AE [mm]
  oval 1.55x0.25 smd: 1(0,0) 2(0,-0.5) 3(0,-1) 4(0,-1.5) 5(0,-2) 6(0,-2.5) 7(0,-3) 8(0,-3.5) 9(0,-4) 10(0,-4.5) 11(0,-5) 12(0,-5.5) 25(8.05,-5.5) 26(8.05,-5) 27(8.05,-4.5) 28(8.05,-4) 29(8.05,-3.5) 30(8.05,-3) 31(8.05,-2.5) 32(8.05,-2) 33(8.05,-1.5) 34(8.05,-1) 35(8.05,-0.5) 36(8.05,0)
  oval 0.25x1.55 smd: 13(1.275,-6.775) 14(1.775,-6.775) 15(2.275,-6.775) 16(2.775,-6.775) 17(3.275,-6.775) 18(3.775,-6.775) 19(4.275,-6.775) 20(4.775,-6.775) 21(5.275,-6.775) 22(5.775,-6.775) 23(6.275,-6.775) 24(6.775,-6.775) 37(6.775,1.275) 38(6.275,1.275) 39(5.775,1.275) 40(5.275,1.275) 41(4.775,1.275) 42(4.275,1.275) 43(3.775,1.275) 44(3.275,1.275) 45(2.775,1.275) 46(2.275,1.275) 47(1.775,1.275) 48(1.275,1.275)
  silkscreen extent -0.13,-5.6 6.88,0.8
DO-214AA [mm]
  rect 2x4 smd: 1(0.002,0.012) 2(5.602,0.012)
  silkscreen extent 0,-1.99 5.6,2.01
DO-214AB [mm]
  rect 3.03x3.82 smd: 1(-3.435,0) 2(3.435,0)
  silkscreen extent -3.6,-3.11 3.6,3.11
FPC-TOP40 [mm]
  rect 0.25x1.2 smd: 1(0,0) 2(0.5,0) 3(1,0) 4(1.5,0) 5(2,0) 6(2.5,0) 7(3,0) 8(3.5,0) 9(4,0) 10(4.5,0) 11(5,0) 12(5.5,0) 13(6,0) 14(6.5,0) 15(7,0) 16(7.5,0) 17(8,0) 18(8.5,0) 19(9,0) 20(9.5,0) 21(10,0) 22(10.5,0) 23(11,0) 24(11.5,0) 25(12,0) 26(12.5,0) 27(13,0) 28(13.5,0) 29(14,0) 30(14.5,0) 31(15,0) 32(15.5,0) 33(16,0) 34(16.5,0) 35(17,0) 36(17.5,0) 37(18,0) 38(18.5,0) 39(19,0) 40(19.5,0)
  rect 2x3 smd: A(-2.25,2.652) B(21.725,2.652)
  silkscreen extent -2.45,-0.25 21.92,5.87
HDR1X3 [mm]
  rect 1.5x1.5 hole 1.2: 1(0,0)
  round 1.5 hole 1.2: 2(2.54,0) 3(5.08,0)
  silkscreen extent -1.27,-1.27 6.35,1.27
HDR2X3 [mm] "Connector; Header; 3x2 Position"
  rect 1.5x1.5 hole 0.9: 1(0,0)
  round 1.5 hole 0.9: 2(0,2.54) 3(2.54,0) 4(2.54,2.54) 5(5.08,0) 6(5.08,2.54)
  silkscreen extent -1.27,-1.27 6.35,3.81
HK4002 [mm]
  oval 2x0.5 smd: 1(0,0) 2(-0.007,-1.5) 3(0,-3.05) 4(0.01,-4.52) 5(0.01,-6.02) 6(0.01,-7.52) 7(0.01,-9.02) 8(0.01,-10.52) 9(0.01,-12.02) 10(0.01,-13.52) 11(0.01,-15.02) 12(0.01,-16.52) 13(0.01,-18.02) 14(0.01,-19.52) 15(0.01,-21.02) 16(0.01,-22.52) 17(19.511,-22.55) 18(19.511,-21.03) 19(19.521,-19.55) 20(19.511,-18.04) 21(19.511,-16.53) 22(19.511,-15.04) 23(19.511,-13.51) 24(19.511,-12.05) 25(19.511,-10.51) 26(19.511,-9) 27(19.511,-7.53) 28(19.521,-6.01) 29(19.511,-4.53) 30(19.521,-3.07) 31(19.511,-1.53) 32(19.511,-0.01)
  silkscreen extent 0.02,-23.63 19.52,1.03
HR911105A [mil]
  rect 80x62 hole 40: 1(0,0)
  oval 80x62 hole 40: 2(-100,50) 3(0,100) 4(-100,150) 5(0,200) 6(-100,250) 7(0,300) 8(-100,350)
  round 72 hole 36: 9(442.91,-85.63) 10(442.91,14) 11(442.91,436) 12(442.91,335.87)
  round 90 hole 65: 13(129.92,-139.76) 13(129.92,490.16)
  round 137.79 hole 137.79: ""(259.45,400.39) ""(260.63,-49.21)
  silkscreen extent -179,-140 687,490
KEY_M [mil]
  round 62 hole 38: 1(0,0) 1(255.9,0) 2(0,-200) 2(255.9,-200)
  silkscreen extent 0,-200 255,0
L0630 [mm]
  rect 1.5x3 smd: 1(-3.3,0) 2(3.3,0)
  silkscreen extent -3.6,-3.3 3.6,3.3
L1270 [mm]
  rect 3.5x6 smd: 1(-5,0) 2(5,0)
  silkscreen extent -6,-6 6,6
N1A [mil]
  round 125 hole 55: 1(0,0) 2(0,190)
  silkscreen extent -69,-74 65,268
SL0603 [mm]
  rect 0.8x0.8 smd: 1(0,0) 2(1.5,0)
  silkscreen extent -0.6,-0.6 2.1,0.6
SL0805 [mil]
  rect 60x50 smd: 1(0,0) 2(90,0)
  silkscreen extent -45,-40 135,40
SO20_M [mm]
  oval 2.6x0.7 smd: 1(-4.6,5.715) 2(-4.6,4.445) 3(-4.6,3.175) 4(-4.6,1.905) 5(-4.6,0.635) 6(-4.6,-0.635) 7(-4.6,-1.905) 8(-4.6,-3.175) 9(-4.6,-4.445) 10(-4.6,-5.715) 11(4.6,-5.715) 12(4.6,-4.445) 13(4.6,-3.175) 14(4.6,-1.905) 15(4.6,-0.635) 16(4.6,0.635) 17(4.6,1.905) 18(4.6,3.175) 19(4.6,4.445) 20(4.6,5.715)
  silkscreen extent -4.72,-6.5 2.9,6.74, body extent -3.75,-6.5 3.75,6.5, height 2.65
SO-8N [mil]
  rect 80x24 smd: 1(0,0)
  oval 80x24 smd: 2(0,-50) 3(0,-100) 4(0,-150) 5(221.9,-150) 6(221.9,-100) 7(221.9,-50) 8(221.9,0)
  silkscreen extent 61,-175 161,25
SOD-323 [mm]
  rect 1x1 smd: 1(-1.2,0) 2(1.2,0)
  silkscreen extent -1,-0.8 1,0.8
sol-18 [mil]
  oval 80x24 smd: 1(0,0) 2(0,-50) 3(0,-100) 4(0,-150) 5(0,-200) 6(0,-250) 7(0,-300) 8(0,-350) 9(0,-400) 10(380,-400) 11(380,-350) 12(380,-300) 13(380,-250) 14(380,-200) 15(380,-150) 16(380,-100) 17(380,-50) 18(380,0)
  silkscreen extent 60,-412 320,25
SOP8-K [mil]
  rect 65x19.29 smd: 1(-156.57,80)
  oval 65x19.29 smd: 2(-156.57,30) 3(-156.57,-20) 4(-156.57,-70) 5(146.57,-70) 6(146.57,-20) 7(146.57,30) 8(146.57,80)
  silkscreen extent -113,-95 102,105
SOP16M [mm]
  rect 0.6x2.2 smd: 1(-4.445,-2.6) 2(-3.175,-2.6) 3(-1.905,-2.6) 4(-0.635,-2.6) 5(0.635,-2.6) 6(1.905,-2.6) 7(3.175,-2.6) 8(4.445,-2.6) 9(4.445,2.6) 10(3.175,2.6) 11(1.905,2.6) 12(0.635,2.6) 13(-0.635,2.6) 14(-1.905,2.6) 15(-3.175,2.6) 16(-4.445,2.6)
  silkscreen extent -5.42,-2.72 5,1.1
SOP-8NT [mil]
  rect 98.43x137.8 smd: 0(110,-75)
  rect 80x24 smd: 1(0,0)
  oval 80x24 smd: 2(0,-50) 3(0,-100) 4(0,-150) 5(221.9,-150) 6(221.9,-100) 7(221.9,-50) 8(221.9,0)
  silkscreen extent 61,-175 161,25
SOT-23 [mil]
  rect 36x36 smd: 1(0,0)
  rect 30x36 smd: 2(75,0)
  rect 36x50 smd: 3(38,80)
  silkscreen extent -20,-5 95,85
SOT-23A [mil]
  rect 36x36 smd: 1(0,0)
  rect 30x36 smd: 2(75,0)
  rect 36x50 smd: 3(38,80)
  silkscreen extent -20,-5 95,85
SOT-23R [mm]
  rect 0.9x0.95 smd: 1(0.95,-1.048) 2(-0.95,-1.048) 3(0,1.302)
  silkscreen extent -2.07,-1.17 1.3,1.3
SOT-25A [mil]
  rect 20x50 smd: 1(0,0) 2(-37,0) 3(-75,0) 4(-75,-100) 5(0,-100)
  silkscreen extent -45,-105 -30,-105
SOT-26A [mil]
  rect 20x50 smd: 1(0,0) 2(-37,0) 3(-75,0) 4(-75,-100) 5(-37,-100) 6(0,-100)
  silkscreen extent -5,-40 5,-30
STM32F429_LQFP208 [mm]
  oval 1.75x0.3 smd: 1(-14.575,12.75) 2(-14.575,12.25) 3(-14.575,11.75) 4(-14.575,11.25) 5(-14.575,10.75) 6(-14.575,10.25) 7(-14.575,9.75) 8(-14.575,9.25) 9(-14.575,8.75) 10(-14.575,8.25) 11(-14.575,7.75) 12(-14.575,7.25) 13(-14.575,6.75) 14(-14.575,6.25) 15(-14.575,5.75) 16(-14.575,5.25) 17(-14.575,4.75) 18(-14.575,4.25) 19(-14.575,3.75) 20(-14.575,3.25) 21(-14.575,2.75) 22(-14.575,2.25) 23(-14.575,1.75) 24(-14.575,1.25) 25(-14.575,0.75) 26(-14.575,0.25) 27(-14.575,-0.25) 28(-14.575,-0.75) 29(-14.575,-1.25) 30(-14.575,-1.75) 31(-14.575,-2.25) 32(-14.575,-2.75) 33(-14.575,-3.25) 34(-14.575,-3.75) 35(-14.575,-4.25) 36(-14.575,-4.75) 37(-14.575,-5.25) 38(-14.575,-5.75) 39(-14.575,-6.25) 40(-14.575,-6.75) 41(-14.575,-7.25) 42(-14.575,-7.75) 43(-14.575,-8.25) 44(-14.575,-8.75) 45(-14.575,-9.25) 46(-14.575,-9.75) 47(-14.575,-10.25) 48(-14.575,-10.75) 49(-14.575,-11.25) 50(-14.575,-11.75) 51(-14.575,-12.25) 52(-14.575,-12.75) 105(14.575,-12.75) 106(14.575,-12.25) 107(14.575,-11.75) 108(14.575,-11.25) 109(14.575,-10.75) 110(14.575,-10.25) 111(14.575,-9.75) 112(14.575,-9.25) 113(14.575,-8.75) 114(14.575,-8.25) 115(14.575,-7.75) 116(14.575,-7.25) 117(14.575,-6.75) 118(14.575,-6.25) 119(14.575,-5.75) 120(14.575,-5.25) 121(14.575,-4.75) 122(14.575,-4.25) 123(14.575,-3.75) 124(14.575,-3.25) 125(14.575,-2.75) 126(14.575,-2.25) 127(14.575,-1.75) 128(14.575,-1.25) 129(14.575,-0.75) 130(14.575,-0.25) 131(14.575,0.25) 132(14.575,0.75) 133(14.575,1.25) 134(14.575,1.75) 135(14.575,2.25) 136(14.575,2.75) 137(14.575,3.25) 138(14.575,3.75) 139(14.575,4.25) 140(14.575,4.75) 141(14.575,5.25) 142(14.575,5.75) 143(14.575,6.25) 144(14.575,6.75) 145(14.575,7.25) 146(14.575,7.75) 147(14.575,8.25) 148(14.575,8.75) 149(14.575,9.25) 150(14.575,9.75) 151(14.575,10.25) 152(14.575,10.75) 153(14.575,11.25) 154(14.575,11.75) 155(14.575,12.25) 156(14.575,12.75)
  oval 0.3x1.75 smd: 53(-12.75,-14.575) 54(-12.25,-14.575) 55(-11.75,-14.575) 56(-11.25,-14.575) 57(-10.75,-14.575) 58(-10.25,-14.575) 59(-9.75,-14.575) 60(-9.25,-14.575) 61(-8.75,-14.575) 62(-8.25,-14.575) 63(-7.75,-14.575) 64(-7.25,-14.575) 65(-6.75,-14.575) 66(-6.25,-14.575) 67(-5.75,-14.575) 68(-5.25,-14.575) 69(-4.75,-14.575) 70(-4.25,-14.575) 71(-3.75,-14.575) 72(-3.25,-14.575) 73(-2.75,-14.575) 74(-2.25,-14.575) 75(-1.75,-14.575) 76(-1.25,-14.575) 77(-0.75,-14.575) 78(-0.25,-14.575) 79(0.25,-14.575) 80(0.75,-14.575) 81(1.25,-14.575) 82(1.75,-14.575) 83(2.25,-14.575) 84(2.75,-14.575) 85(3.25,-14.575) 86(3.75,-14.575) 87(4.25,-14.575) 88(4.75,-14.575) 89(5.25,-14.575) 90(5.75,-14.575) 91(6.25,-14.575) 92(6.75,-14.575) 93(7.25,-14.575) 94(7.75,-14.575) 95(8.25,-14.575) 96(8.75,-14.575) 97(9.25,-14.575) 98(9.75,-14.575) 99(10.25,-14.575) 100(10.75,-14.575) 101(11.25,-14.575) 102(11.75,-14.575) 103(12.25,-14.575) 104(12.75,-14.575) 157(12.75,14.575) 158(12.25,14.575) 159(11.75,14.575) 160(11.25,14.575) 161(10.75,14.575) 162(10.25,14.575) 163(9.75,14.575) 164(9.25,14.575) 165(8.75,14.575) 166(8.25,14.575) 167(7.75,14.575) 168(7.25,14.575) 169(6.75,14.575) 170(6.25,14.575) 171(5.75,14.575) 172(5.25,14.575) 173(4.75,14.575) 174(4.25,14.575) 175(3.75,14.575) 176(3.25,14.575) 177(2.75,14.575) 178(2.25,14.575) 179(1.75,14.575) 180(1.25,14.575) 181(0.75,14.575) 182(0.25,14.575) 183(-0.25,14.575) 184(-0.75,14.575) 185(-1.25,14.575) 186(-1.75,14.575) 187(-2.25,14.575) 188(-2.75,14.575) 189(-3.25,14.575) 190(-3.75,14.575) 191(-4.25,14.575) 192(-4.75,14.575) 193(-5.25,14.575) 194(-5.75,14.575) 195(-6.25,14.575) 196(-6.75,14.575) 197(-7.25,14.575) 198(-7.75,14.575) 199(-8.25,14.575) 200(-8.75,14.575) 201(-9.25,14.575) 202(-9.75,14.575) 203(-10.25,14.575) 204(-10.75,14.575) 205(-11.25,14.575) 206(-11.75,14.575) 207(-12.25,14.575) 208(-12.75,14.575)
  silkscreen extent -14.7,-13.3 13.3,13.57
TO-263 [mm]
  rect 10x10 smd: 0(3.4,8)
  rect 1x2 smd: 1(0,0) 2(1.7,0) 3(3.4,0) 4(5.1,0) 5(6.8,0)
  silkscreen extent 0,1.65 6.73,2.41
TSOP48 [mm]
  rect 1.5x0.27 smd: 1(0,0.075)
  oval 1.5x0.27 smd: 2(0.007,-0.506) 3(0.007,-1.006) 4(0.007,-1.506) 5(0.007,-2.006) 6(0.007,-2.506) 7(0.007,-3.006) 8(0.007,-3.506) 9(0.007,-4.006) 10(0.007,-4.506) 11(0.007,-5.006) 12(0.007,-5.506) 13(0.007,-6.006) 14(0.007,-6.506) 15(0.007,-7.006) 16(0.007,-7.506) 17(0.007,-8.006) 18(0.007,-8.506) 19(0.007,-9.006) 20(0.007,-9.506) 21(0.007,-10.006) 22(0.007,-10.506) 23(0.007,-11.006) 24(0.007,-11.506) 25(19.807,-11.506) 26(19.807,-11.006) 27(19.807,-10.506) 28(19.807,-10.006) 29(19.807,-9.506) 30(19.807,-9.006) 31(19.807,-8.506) 32(19.807,-8.006) 33(19.807,-7.506) 34(19.807,-7.006) 35(19.807,-6.506) 36(19.807,-6.006) 37(19.807,-5.506) 38(19.807,-5.006) 39(19.807,-4.506) 40(19.807,-4.006) 41(19.807,-3.506) 42(19.807,-3.006) 43(19.807,-2.506) 44(19.807,-2.006) 45(19.807,-1.506) 46(19.807,-1.006) 47(19.807,-0.506) 48(19.807,-0.006)
  silkscreen extent 1.54,-11.76 18.27,0.24
TSOP54 [mm]
  rect 2x0.4 smd: 1(0,0) 2(0,-0.8) 3(0,-1.6) 4(0,-2.4) 5(0,-3.2) 6(0,-4) 7(0,-4.8) 8(0,-5.6) 9(0,-6.4) 10(0,-7.2) 11(0,-8) 12(0,-8.8) 13(0,-9.6) 14(0,-10.4) 15(0,-11.2) 16(0,-12) 17(0,-12.8) 18(0,-13.6) 19(0,-14.4) 20(0,-15.2) 21(0,-16) 22(0,-16.8) 23(0,-17.6) 24(0,-18.4) 25(0,-19.2) 26(0,-20) 27(0,-20.8) 28(12,-20.8) 29(12,-20) 30(12,-19.2) 31(12,-18.4) 32(12,-17.6) 33(12,-16.8) 34(12,-16) 35(12,-15.2) 36(12,-14.4) 37(12,-13.6) 38(12,-12.8) 39(12,-12) 40(12,-11.2) 41(12,-10.4) 42(12,-9.6) 43(12,-8.8) 44(12,-8) 45(12,-7.2) 46(12,-6.4) 47(12,-5.6) 48(12,-4.8) 49(12,-4) 50(12,-3.2) 51(12,-2.4) 52(12,-1.6) 53(12,-0.8) 54(12,0)
  silkscreen extent 1.83,-21.2 10.16,0.4
TSSOP-10 [mm]
  rect 1x0.25 smd: 1(0,0)
  oval 1x0.25 smd: 2(0,-0.5) 3(0,-1) 4(0,-1.5) 5(0,-2) 6(4.5,-2) 7(4.5,-1.5) 8(4.5,-1) 9(4.5,-0.5) 10(4.5,0)
  silkscreen extent 0.89,-2.54 3.68,0.51
USB/20-1 [mm]
  oval 1.5x2 hole 1: 1(3.7,-0.5) 4(10.3,-0.5)
  oval 1.2x2 hole 1: 2(6.2,-0.5) 3(7.8,-0.5)
  rect 2x2 hole 1.2: 5(1.2,2.6) 5(1.2,2.9) 5(1.2,3.2) 5(1.2,1.7) 5(1.2,2) 5(1.2,2.3) 6(12.8,1.7) 6(12.8,2) 6(12.8,2.3) 6(12.8,2.6) 6(12.8,2.9) 6(12.8,3.2)
  round 0 hole 1.5: 5(4.6,2.5) 6(9.3,2.5)
  silkscreen extent 0,0 14,5
USB/30 [mm]
  oval 1.5x2 hole 1: 1(3.7,-0.5) 4(10.3,-0.5)
  oval 1.2x2 hole 1: 2(6.2,-0.5) 3(7.8,-0.5)
  rect 2x3.5 hole 1.2 slot 2.5 at 90 deg: 5(1.2,2.5) 6(12.8,2.5)
  round 0 hole 1.5: 5(4.6,2.5) 6(9.3,2.5)
  silkscreen extent 0,0 14,5
USB/SM0.8-6H5 [mm]
  rect 2.3x0.5 smd: 1(0,0) 2(0,0.8) 3(0,1.6) 4(0,2.4) 5(0,3.2)
  rect 2.5x2 smd: 6(0.1,6.05) 7(5.854,6.05) 8(0.1,-2.85) 9(5.854,-2.85)
  round 0.6 hole 1.27 unplated: MH1(2.6,3.8) MH2(2.6,-0.6)
  silkscreen extent -1.82,-3.35 8.55,6.55
X5032-1 [mm]
  rect 1.4x1.2 smd: 1(-1.5,-1.1) 2(1.5,-1.1) 3(1.5,1.1) 4(-1.5,1.1)
  silkscreen extent -2.69,-1.75 2.54,1.6
XTAL-3215 [mm]
  rect 1.4x1.2 smd: 1(0,0) 2(2.2,0)
  silkscreen extent 1.02,-0.63 1.27,0.64
XTAL_US [mil]
  round 50 hole 28: 1(0,0) 2(192.13,0)
  silkscreen extent -131,-98 323,98
杜邦线插脚 [mil]
  round 60 hole 36: 1(0,-100) 2(100,-100) 3(200,-100) 4(300,-100) 5(400,-100) 6(500,-100) 7(600,-100) 8(700,-100) 9(800,-100) 10(900,-100) 11(1000,-100) 12(1100,-100) 13(1200,-100) 14(1300,-100) 15(1400,-100) 16(1500,-100) 17(1600,-100) 18(1700,-100) 19(1800,-100) 20(1900,-100) 21(0,0) 22(100,0) 23(200,0) 24(300,0) 25(400,0) 26(500,0) 27(600,0) 28(700,0) 29(800,0) 30(900,0) 31(1000,0) 32(1100,0) 33(1200,0) 34(1300,0) 35(1400,0) 36(1500,0) 37(1600,0) 38(1700,0) 39(1800,0) 40(1900,0)
  silkscreen extent -53,-142 1951,35

## Part data
*R11 *R15 *R16 *R19 *R48 R1 R2 R3 R6 R7 R8 R9 R10 R12 R13 R14 R17 R18 R39 R40 R41 R42 R43 R44 R45 R46 R47 R49 R50 R51 R102 R105 R106: library part RES2
BOOT: "Header, 3-Pin, Dual row"
BT1: library part BATTERY
C1 C2 C3 C4 C5 C6 C7 C8 C9 C10 C11 C12 C13 C14 C15 C16 C17 C18 C19 C21 C22 C23 C24 C25 C26 C27 C28 C29 C30 C31 C32 C33 C34 C35 C36 C37 C38 C39 C40 C41 C42 C43 C60 C61 C62 C63 C64 C65 C66 C67 C68 C110 C112 C113 CD1 CD2: library part CAP, "Capacitor"
C20 C44 C45 C46 C47 C48 C49 C50 C51 C52 C55 C56 C57 C58 C59: "1nF"
C53: library part "Cap NP", "电容"
C54 C78 C79 C80 C81 C82 C83: library part C
C71 C72 C73: library part Cap, "Capacitor"
C?: "10uF/16V"
CA1 CA2 CE1: library part ELECTRO2, "Electrolytic Capacitor"
CE2 CE3 CE4 CE5: library part CAP3
D2 D3: library part Diode, "Default Diode"
D4: library part D
D18 D22 D23 D24: library part ZENER2, "Zener Diode"
D60: library part "DIODE SCHOTTKY", "Schottky Diode"
FB1 FB6 FB7: library part "120 OHM/2A@100MHz"
FB10: library part INDUCTOR
J3: library part "HR911105A 1"
L1: library part INDUCTOR1, "INDUCTOR"
L2 L3: library part Inductor, "Inductor"
LED1 LED2 LED3: library part LED-S
P1: library part CON5, "Connector"
P5: "Header, 3-Pin"
P9 P10 P11 P15 P16 P18: "Connector"
Q1: library part PNP, "8550/BCW68"
Q2 Q5: library part NPN, "8050/BCW846/BCW847"
Q20: "PNP SOT23"
R4 R5 R20 R21 R22 R23: library part R
R32 R33: library part RES
R52 R53 R56 R57: library part Res2, "Resistor"
R54 R55: library part RES2, "Resistor"
U1: library part IS42S16160B, "32MB SDRAM"
U2: library part K9F2G08U0C, "256MB NAND FLASH"
U3: library part REF195ES
U4: library part SP504, "二极管"
U7: library part W25Q128, "W25Q128"
U8: library part 24C256, "EEPROM"
U9: "USB2UART"
U11: library part LM2576-ADJ
USB_1: library part USB5
USCQ1 USCQ2 USCQ3 USCQ4 USCQ5 USCQ6 USCQ7 USCQ8 USCQ9 USCQ10 USCQ11 USCQ12 USCQ13 USCQ14 USCQ15: library part SN74HC573DW, "Octal D-Type Transparent Latch with 3-State Outputs"
WK1: library part "HEADER 3"
X1: "Crystal"
X2: library part POWER_CRYSTAL
Y1: library part XTAL, "Crystal Oscillator"
Y2: library part CRYSTAL2
Y4: library part XTAL_2, "Crystal Oscillator"

## Via types
v1: diameter 0.5, hole 0.3, Top Layer to Bottom Layer, 919 vias

## Nets (pads, with @x,y where several pads share a name; then routed paths per layer and width w, separated by ;. In a path a pad name is that pad's centre, name@x,y a point inside that pad or via, vN(x,y) a via of type N, cw(c..) or ccw(c..) an arc to the next point about the centre after c; other vN are vias at no path point)
ADIN2: U5.55
ADIN3: U5.56
ADIN4: U5.36
ADIN5: U5.57
ADIN6: U5.58
BOOT0: R2.2 R5.1 R22.2@56.025,19.225 U5.197 | length 70.7
  Top Layer w0.254: R22.2@55.975,19.2 55.975,20.125 57.2,21.35 73.3,21.35 74.82,19.83 74.834,19.83 75.314,19.35 86.211,19.35 86.75,18.811 86.75,18.637 87.087,18.3 87.725,18.3 v1(88.05,17.975) ; v1(102.85,26.3) 102.85,30.975 103.502,31.627 105.988,31.627 105.99,31.625 107.825,31.625 107.975,31.775 R5.1@107.975,32.2 ; R2.2@107.95,34 107.95,32.375 R5.1@107.975,32.35 ; R2.2@108.025,33.825 108.075,33.875 108.8,33.875 110.353,32.322 U5.197@112.526,32.322
  Bottom Layer w0.254: v1@88,18 91.85,18 100.225,26.375 100.3,26.3 v1(102.85,26.3)
BOOT1: R3.2 R4.2 U5.63 | length 5.1
  Top Layer w0.254: U5.63@141.676,31.822 144.699,31.822 145.032,32.156 145.032,30.543 R3.2@145.05,30.525
BT_VCC: *R19.1 C24.2 D59.3 DS1.8 | length 28.5
  Top Layer w0.254: D59.3@85.162,15.09 85.798,14.454 87.85,14.454 ; C24.2@87.925,10.4 87.925,12 87.85,12.075 87.85,14.454 ; v1(90.45,19.562) 89.3,18.512 89.3,15.112 88.642,14.454 87.85,14.454 ; v1(96.25,25.462) 96.25,28.487 97.25,29.487 DS1.8@99.286,29.487
  Bottom Layer w0.254: v1(90.45,19.562) v1(96.25,25.462)
BUZZER: U5.193
"CH340 D+": U9.5 USB_1.3 USB_2.3 | length 70
  Top Layer w0.5: USB_1.3@8.7,27.65 15.9,27.65 ; 15.925,27.625 15.925,26.125 17.55,26.125 17.6,26.175 17.6,27.475 19.684,27.475 26.443,20.716 36.584,20.716 37.177,20.123 37.177,14.764 36.665,14.252 U9.5@34.525,14.252
  Bottom Layer w0.5: USB_2.3@10.25,15.475 13.65,15.475 15.625,13.5 26.3,13.5 27.075,14.275 v1(36.55,14.275)
"CH340 D-": U9.6 USB_1.2 USB_2.2 | length 71.6
  Top Layer w0.5: USB_1.2@8.7,28.45 19.646,28.45 19.671,28.475 26.732,21.414 36.873,21.414 37.875,20.412 37.875,13.687 37.17,12.982 U9.6@34.525,12.982
  Bottom Layer w0.5: USB_2.2@10.225,13.875 12.125,13.875 15.125,10.875 29.575,10.875 31.675,12.975 v1(36.8,12.975)
CH_PD: U5.7
CPU-VDDA: C17.2 C18.2 FB6.2 U5.42 | length 15.6
  Top Layer w0.254: U5.42@134.851,24.997 134.851,22.915 135.472,22.293 140.782,22.293 141.4,21.675 141.4,21 142.075,20.325 142.075,18.7 143.7,18.7 143.725,18.675 FB6.2@145.275,18.675
CPU-VSSA: C17.1 C18.1 FB7.2 U5.40 | length 17.9
  Top Layer w0.254: U5.40@133.851,24.997 133.851,22.636 135.098,21.389 139.386,21.389 140.825,19.95 140.825,17.55 141.2,17.175 143.968,17.175 144.043,17.1 145.462,17.1 FB7.2@145.599,16.963
DAC1: U5.53
DAC2: U5.54
DM9000_RX+: J3.3 R44.2 U20.3 | length 28.9
  Top Layer w0.254: U20.3@202.675,52.625 204.55,52.625 205.945,51.23 R44.2@207.72,51.23
  Bottom Layer w0.254: v1(206.75,51.2) 213.425,51.2 222.7,41.925 225.71,41.925 J3.3@226.075,42.29
DM9000_RX-: J3.6 R45.2 U20.4 | length 24.8
  Top Layer w0.254: U20.4@202.675,53.125 205.05,53.125 205.32,52.855 R45.2@207.67,52.855
  Bottom Layer w0.254: v1(206.625,52.85) 215.025,52.85 221.775,46.1 J3.6@223.535,46.1
DM9000_TX+: J3.1 R42.2 U20.7 | length 46.4
  Top Layer w0.254: U20.7@202.675,54.625 R42.2@207.49,54.625
  Bottom Layer w0.254: v1(206.7,54.625) 205.75,55.575 205.75,57.1 207,58.35 219.2,58.35 228.725,48.825 228.725,40.5 227.975,39.75 J3.1@226.075,39.75
DM9000_TX-: J3.2 R43.2 U20.8 | length 42.9
  Top Layer w0.254: U20.8@202.675,55.125 204.15,55.125 205.455,56.43 R43.2@207.695,56.43
  Bottom Layer w0.254: v1(206.725,56.45) 206.725,57 207.475,57.75 217.95,57.75 227.925,47.775 227.925,41.375 227.275,40.725 223.83,40.725 J3.2@223.535,41.02
DMLEDL: J3.10 U20.38 | length 51.2
  Top Layer w0.254: v1@195.85,48.625 196.4,49.175 U20.38@196.4,50.35
  Bottom Layer w0.254: v1(195.9,48.65) 195.9,48 196.375,47.525 200.325,47.525 200.85,48.05 212.2,48.05 222.925,37.325 228.1,37.325 232.275,41.5 235.931,41.5 J3.10@237.325,40.106
DMLEDR: J3.12 U20.39 | length 51.9
  Top Layer w0.254: v1@196.7,48.575 196.9,48.775 U20.39@196.9,50.35
  Bottom Layer w0.254: v1(196.75,48.6) 197.375,49.225 212.475,49.225 223.625,38.075 227.675,38.075 237.325,47.725 J3.12@237.325,48.281
DOT1: T1.1 UDLDG1.18 | length 30.3
  Top Layer w0.5: UDLDG1.18@27,102.427 27,116.9 31.635,121.535 T1.1@40.9,121.535
DOT2: T2.1 UDLDG1.17 | length 110
  Top Layer w0.5: UDLDG1.17@28.27,102.427 v1@28.27,104.57 ; v1@28.675,124.6 29.9,125.825 74.563,125.825 74.961,126.223 87.854,126.223 87.919,126.158 89.867,126.158 92.125,123.9 v1(93.875,123.9)
  Bottom Layer w0.5: v1(28.225,104.6) 28.25,104.625 28.25,124.125 v1(28.7,124.575) ; v1@93.85,123.875 104.5,123.875 106.64,121.735 T2.1@113.825,121.735
DOT3: T3.1 UDLDG1.16 | length 178
  Top Layer w0.5: v1@29.54,97.86 UDLDG1.16@29.54,102.427
  Bottom Layer w0.5: v1@29.525,97.85 v1(29.55,97.85) 29.55,97.55 29.9,97.2 177.875,97.2 179.05,98.375 179.05,121.285 T3.1@179.1,121.335
DOT4: T3.21 UDLDG1.15 | length 177.6
  Top Layer w0.5: UDLDG1.15@30.81,102.427 30.81,98.39 v1(30.825,98.375)
  Bottom Layer w0.5: v1(30.825,98.375) 31.302,97.898 86.322,97.898 86.324,97.9 176.802,97.9 178.35,99.448 178.35,117.875 177.775,118.45 177.775,122.55 T3.21@179.1,123.875
DOT5: T2.21 UDLDG1.14 | length 119.5
  Top Layer w0.5: UDLDG1.14@32.08,102.427 v1@32.08,104.83 ; v1(32.125,131.875) 58.9,131.875 59.95,132.925 70.901,132.925 70.976,133 112.4,133 113.825,131.575 T2.21@113.825,124.275
  Bottom Layer w0.5: v1(32.075,104.825) 32.125,104.875 v1(32.125,131.875)
DOT6: T1.21 UDLDG1.13 | length 25.8
  Top Layer w0.5: UDLDG1.13@33.35,102.427 33.4,102.477 33.4,106.875 42.15,115.625 42.15,122.825 T1.21@40.9,124.075
DOT7: T1.2 UDLDG1.12 | length 22.8
  Top Layer w0.5: UDLDG1.12@34.62,102.427 34.62,106.095 43.45,114.925 43.45,116.44 43.44,116.45 T1.2@43.44,121.535
DOT8: T2.2 UDLDG1.11 | length 107.2
  Top Layer w0.5: UDLDG1.11@35.89,102.427 v1@35.89,104.335 ; v1@35.929,126.925 88.139,126.925 88.208,126.856 90.294,126.856 92.425,124.725 v1(93.825,124.725)
  Bottom Layer w0.5: v1(35.875,104.4) 35.875,126.9 v1(35.95,126.975) ; v1@93.775,124.75 105.425,124.75 107.125,123.05 115.05,123.05 T2.2@116.365,121.735
DOT9: T3.2 UDLDG2.18 | length 172.1
  Top Layer w0.5: UDLDG2.18@40.975,102.377 40.975,96.225 41,96.25 v1(41,96.2)
  Bottom Layer w0.5: v1(41,96.2) 41.525,95.675 49.438,95.675 49.488,95.725 50.262,95.725 50.264,95.723 87.109,95.723 87.111,95.725 180.608,95.725 181.64,96.757 T3.2@181.64,121.335
DOT10: T3.22 UDLDG2.17 | length 171
  Top Layer w0.5: v1(42.225,96.5) 42.245,96.52 UDLDG2.17@42.245,102.377
  Bottom Layer w0.5: v1(42.225,96.5) 89.923,96.5 89.948,96.475 178.675,96.475 179.8,97.6 179.8,119.275 180.35,119.825 180.35,121.826 180.325,121.851 180.325,122.275 181.64,123.59 T3.22@181.64,123.875
DOT11: T2.22 UDLDG2.16 | length 103.5
  Top Layer w0.5: UDLDG2.16@43.515,102.427 v1@43.515,106.39 ; v1(44.05,128.325) 44.175,128.2 46.763,128.2 46.886,128.323 88.715,128.323 88.786,128.252 90.973,128.252 93.104,126.121 94.403,126.121 95.074,125.45 v1(95.1,125.45)
  Bottom Layer w0.5: v1(43.525,106.35) 42.15,107.725 42.15,126.825 43.65,128.325 v1(44.05,128.325) ; v1@95.1,125.448 105.714,125.448 107.412,123.75 111.075,123.75 112.925,125.6 115.675,125.6 116.365,124.91 T2.22@116.365,124.275
DOT12: T1.22 UDLDG2.15 | length 22.3
  Top Layer w0.5: T1.22@43.44,124.075 44.675,122.84 44.675,102.487 UDLDG2.15@44.785,102.377
DOT13: T1.3 UDLDG2.14 | length 19.7
  Top Layer w0.5: 45.975,116.96 45.975,102.457 UDLDG2.14@46.055,102.377 ; 45.98,116.425 T1.3@45.98,121.535
DOT14: T2.3 UDLDG2.13 | length 99.4
  Top Layer w0.5: v1@47.2,127.623 88.428,127.623 88.497,127.554 90.583,127.554 92.714,125.423 94.114,125.423 94.523,125.014 94.523,124.952 96.05,123.425 105.9,123.425 106.277,123.048 117.592,123.048 T2.3@118.905,121.735 ; UDLDG2.13@47.325,102.427 v1(47.325,104.75)
  Bottom Layer w0.5: v1(47.175,127.625) 47.25,127.55 47.25,122.096 47.31,122.036 47.31,121.034 47.325,121.019 v1(47.325,104.75)
DOT15: T3.3 UDLDG2.12 | length 171.7
  Top Layer w0.5: v1(48.575,94.8) 48.575,97.317 48.595,97.337 ; 48.595,95.055 UDLDG2.12@48.595,102.377
  Bottom Layer w0.5: v1@48.55,94.75 49,94.3 182.5,94.3 184.175,95.975 184.175,100.5 184.18,100.505 T3.3@184.18,121.335
DOT16: T3.23 UDLDG2.11 | length 169.1
  Top Layer w0.5: v1(49.825,95) 49.825,95.545 49.865,95.585 UDLDG2.11@49.865,102.377
  Bottom Layer w0.5: v1(49.825,95) 49.85,95.025 181.625,95.025 182.97,96.37 182.97,122.665 T3.23@184.18,123.875
DOT17: T2.23 UDLDG3.18 | length 102.3
  Top Layer w0.5: UDLDG3.18@54.85,102.427 v1(54.85,103.85) ; v1@54.925,133.875 v1(54.95,133.875) 114.15,133.875 118.905,129.12 T2.23@118.905,124.275
  Bottom Layer w0.5: v1(54.85,103.85) 54.93,103.93 54.93,133.855 v1(54.95,133.875)
DOT18: T1.23 UDLDG3.17 | length 29.5
  Top Layer w0.5: T1.23@45.98,124.075 47.19,122.865 47.19,117.335 47.175,117.32 47.175,106.75 49.25,104.675 55.45,104.675 56.12,104.005 UDLDG3.17@56.12,102.427
DOT19: T1.4 UDLDG3.16 | length 26.7
  Top Layer w0.5: 48.52,116.45 T1.4@48.52,121.535 ; 48.525,116.96 48.525,107.3 50.15,105.675 56,105.675 57.39,104.285 UDLDG3.16@57.39,102.427
DOT20: T2.4 UDLDG3.15 | length 106.4
  Top Layer w0.5: v1(57.3,134.65) 115.325,134.65 120.275,129.7 120.275,124.856 120.235,124.816 120.235,122.69 121.19,121.735 T2.4@121.445,121.735 ; UDLDG3.15@58.66,102.427 v1@58.66,104.16
  Bottom Layer w0.5: v1(57.3,134.65) 57.35,134.6 57.35,105.475 v1(58.65,104.175)
DOT21: T3.4 UDLDG3.14 | length 160.4
  Top Layer w0.5: v1@59.925,129.45 v1(59.95,129.45) 60.125,129.275 92.439,129.275 93.964,127.75 v1(93.975,127.75) ; UDLDG3.14@59.93,102.427 v1@59.93,104.18
  Bottom Layer w0.5: v1(59.9,104.15) 59.95,104.2 v1(59.95,129.45) ; v1(93.975,127.75) 182.4,127.75 183.35,128.7 185.475,126.575 185.475,122.58 T3.4@186.72,121.335
DOT22: T3.24 UDLDG3.13 | length 159.9
  Top Layer w0.5: UDLDG3.13@61.2,102.427 v1@61.2,104.15 ; v1(62.475,132.2) 67.55,132.2 68.95,130.8 72.284,130.8 72.286,130.802 72.864,130.802 72.866,130.8 88.45,130.8 89.2,130.05 92.651,130.05 93.247,129.454 93.771,129.454 v1(93.775,129.45)
  Bottom Layer w0.5: v1(61.2,104.175) 61.2,108.875 62.55,110.225 62.55,132.125 v1(62.475,132.2) ; v1(93.775,129.45) 184.25,129.45 186.72,126.98 T3.24@186.72,123.875
DOT23: T2.24 UDLDG3.12 | length 121.4
  Top Layer w0.5: v1@53,135.475 53,135.5 116.05,135.5 121.445,130.105 T2.24@121.445,124.275 ; UDLDG3.12@62.47,102.427 v1@62.47,104.07
  Bottom Layer w0.5: v1(53.05,135.55) 53.05,127.125 52.3,126.375 52.3,104.2 54.075,102.425 60.825,102.425 v1(62.475,104.075)
DOT24: T1.24 UDLDG3.11 | length 33.7
  Top Layer w0.5: T1.24@48.52,124.075 48.52,124.055 49.825,122.75 49.825,108.1 51.1,106.825 56.2,106.825 57.9,105.125 62.65,105.125 63.74,104.035 UDLDG3.11@63.74,102.427
DOT25: T1.5 UDLDG4.18 | length 26.7
  Top Layer w0.5: T1.5@51.06,121.535 51.19,121.535 51.692,121.033 51.692,120.745 52.81,119.627 53.098,119.627 68.8,103.925 UDLDG4.18@68.8,102.452
DOT26: T2.5 UDLDG4.17 | length 102.5
  Top Layer w0.5: v1@66.925,136.198 117.027,136.198 122.725,130.5 122.725,122.995 T2.5@123.985,121.735 ; UDLDG4.17@70.07,102.452 v1@70.07,104.02
  Bottom Layer w0.5: v1(66.9,136.2) 66.9,128.9 67.625,128.175 67.625,106.5 v1(70.075,104.05)
DOT27: T3.5 UDLDG4.16 | length 155.8
  Top Layer w0.5: v1(70.175,131.825) 70.448,131.552 88.948,131.552 89.752,130.748 92.94,130.748 93.536,130.152 v1(94.15,130.15) v1(94.15,130.15) ; UDLDG4.16@71.34,102.452 v1@71.34,104.185
  Bottom Layer w0.5: v1@70.17,131.825 70.17,105.33 v1(71.35,104.15) ; v1(94.15,130.15) 94.175,130.175 184.65,130.175 188.05,126.775 188.05,122.545 T3.5@189.26,121.335
DOT28: T3.25 UDLDG4.15 | length 151.8
  Top Layer w0.5: v1(72.6,132.25) 89.375,132.25 89.702,131.923 89.702,131.911 90.138,131.475 93.2,131.475 v1(93.825,130.85) ; UDLDG4.15@72.61,102.452 v1@72.61,104.06
  Bottom Layer w0.5: v1(72.6,132.25) 72.59,132.24 72.59,104.11 v1(72.625,104.075) ; v1@93.802,130.85 93.825,130.873 185.352,130.873 189.26,126.965 T3.25@189.26,123.875
DOT29: T2.25 UDLDG4.14 | length 111.4
  Top Layer w0.5: v1(65.55,136.95) 117.525,136.95 123.985,130.49 T2.25@123.985,124.275 ; v1@73.88,100.695 UDLDG4.14@73.88,102.452
  Bottom Layer w0.5: v1(65.55,136.95) 65.55,126.925 65.025,126.4 65.025,105.725 70.05,100.7 v1(73.85,100.7)
DOT30: T1.25 UDLDG4.13 | length 34.8
  Top Layer w0.5: T1.25@51.06,124.075 51.06,123.64 52.39,122.31 52.39,121.034 53.099,120.325 53.387,120.325 67.862,105.85 72.95,105.85 75.175,103.625 75.175,103.575 75.15,103.55 UDLDG4.13@75.15,102.452
DOT31: T1.6 UDLDG4.12 | length 32.5
  Top Layer w0.5: T1.6@53.6,121.535 53.6,121.2 65.536,109.264 68.225,106.575 73.325,106.575 74.75,105.15 76.42,105.15 UDLDG4.12@76.42,102.452
DOT32: T2.6 UDLDG4.11 | length 84.3
  Top Layer w0.5: v1@75.175,100.725 77.45,100.725 77.69,100.965 UDLDG4.11@77.69,102.452 ; v1@75.25,125.525 v1@75.287,125.488 ; v1(75.3,125.5) 75.34,125.46 89.54,125.46 90.95,124.05 90.95,123.1 91.2,122.85 v1(93.9,122.85)
  Bottom Layer w0.5: v1(75.15,100.675) 75.15,125.35 v1(75.3,125.5) ; v1@93.95,122.9 103.675,122.9 106.525,120.05 125.85,120.05 126.525,120.725 T2.6@126.525,121.735
DOT33: T3.6 UDLDG5.18 | length 132.3
  Top Layer w0.5: UDLDG5.18@82.775,102.377 82.775,101.05 84.375,99.45 187.415,99.45 187.601,99.636 190.986,99.636 v1(191.8,100.45)
  Bottom Layer w0.5: v1(191.8,100.45) T3.6@191.8,121.335
DOT34: T3.26 UDLDG5.17 | length 147.3
  Top Layer w0.5: UDLDG5.17@84.045,102.377 84.045,101.255 85.15,100.15 v1@93.025,100.15
  Bottom Layer w0.5: v1@93.025,100.125 92.252,100.898 92.252,130.702 93.15,131.6 188.727,131.6 191.8,128.527 T3.26@191.8,123.875
  other v1: 93,100.15
DOT35: T2.26 UDLDG5.16 | length 70.1
  Top Layer w0.5: UDLDG5.16@85.315,102.377 85.315,101.108 85.548,100.875 v1(93.95,100.875) ; v1@94.475,120.075 v1(94.475,120.15) 94.475,121.6 95.225,122.35 106.375,122.35 108.554,120.171 127.521,120.171 127.855,120.505 127.855,122.236 127.925,122.306 127.925,122.875 T2.26@126.525,124.275
  Bottom Layer w0.5: v1(93.95,100.875) 94.475,101.4 v1(94.475,120.15)
DOT36: T1.26 UDLDG5.15 | length 43.7
  Top Layer w0.5: T1.26@53.6,124.075 54.925,122.75 54.925,121.039 55.639,120.325 55.675,120.325 68.65,107.35 73.55,107.35 75.05,105.85 77.275,105.85 79.182,103.943 86.307,103.943 86.585,103.665 UDLDG5.15@86.585,102.377
DOT37: T1.7 UDLDG5.14 | length 40.8
  Top Layer w0.5: T1.7@56.14,121.535 56.14,121.01 69.102,108.048 73.852,108.048 75.3,106.6 77.512,106.6 79.471,104.641 87.014,104.641 87.855,103.8 UDLDG5.14@87.855,102.377
DOT38: T2.7 UDLDG5.13 | length 61.2
  Top Layer w0.5: UDLDG5.13@89.075,102.377 89.075,104.125 ; 89.1,104.15 89.1,104.2 89.4,104.5 v1@95.825,104.5 ; v1@95.8,120.525 96.725,121.45 105.75,121.45 107.727,119.473 128.723,119.473 129.065,119.815 T2.7@129.065,121.735
  Bottom Layer w0.5: v1(95.825,120.525) 95.825,104.5 v1(95.85,104.475)
DOT39: T3.7 UDLDG5.12 | length 142.3
  Top Layer w0.5: UDLDG5.12@90.395,102.377 v1@90.4,103.725 ; v1(90.4,132.2) v1@92.6,132.2
  Bottom Layer w0.5: v1@90.4,132.25 v1(90.4,132.2) 90.4,103.825 v1(90.425,103.8) ; v1@92.65,132.25 92.698,132.298 190.227,132.298 193.125,129.4 193.125,122.575 193.15,122.55 193.15,122.525 194.34,121.335 T3.7@194.265,121.335
  other v1: 92.625,132.225
DOT40: T3.27 UDLDG5.11 | length 140.9
  Top Layer w0.5: UDLDG5.11@91.515,102.352 v1@91.515,103.7
  Bottom Layer w0.5: v1(91.529,103.73) 91.529,132.129 92.396,132.996 192.454,132.996 194.34,131.11 T3.27@194.34,123.875
DOT41: T2.27 UDLDG6.18 | length 57.3
  Top Layer w0.5: UDLDG6.18@96.8,102.377 v1(96.8,104.1)
  Bottom Layer w0.5: v1(96.8,104.1) 96.8,119.35 97.325,119.875 97.325,119.9 99.573,122.148 103.239,122.148 106.041,119.346 128.436,119.346 129.933,120.843 130.1,120.843 130.325,121.068 130.325,122.8 129.065,124.06 T2.27@129.065,124.275
DOT42: T1.27 UDLDG6.17 | length 53.1
  Top Layer w0.5: T1.27@56.14,124.075 57.4,122.815 57.4,120.925 69.579,108.746 74.141,108.746 75.587,107.3 77.799,107.3 79.76,105.339 87.511,105.339 87.525,105.325 96.875,105.325 98.07,104.13 UDLDG6.17@98.07,102.377
DOT43: T1.8 UDLDG6.16 | length 49.9
  Top Layer w0.5: T1.8@58.68,121.535 58.68,120.82 70.056,109.444 74.43,109.444 75.876,107.998 78.088,107.998 80.049,106.037 88.088,106.037 88.102,106.023 97.227,106.023 99.34,103.91 UDLDG6.16@99.34,102.377
DOT44: T2.8 UDLDG6.15 | length 53.3
  Top Layer w0.5: UDLDG6.15@100.61,102.377 v1@100.61,104.01
  Bottom Layer w0.5: v1(100.6,104) 100.6,121.175 100.875,121.45 102.95,121.45 105.752,118.648 128.725,118.648 130.222,120.145 131.605,120.145 T2.8@131.605,121.735
DOT45: T3.8 UDLDG6.14 | length 116.5
  Top Layer w0.5: UDLDG6.14@101.88,102.377 v1@101.88,103.955 ; v1@102.025,120.575 105.225,120.575 107.025,118.775 129.977,118.775 130.54,119.338 162.337,119.338 163.052,118.623 191.811,118.623 192.336,119.148 196.398,119.148 196.88,119.63 T3.8@196.88,121.335
  Bottom Layer w0.5: v1(101.875,103.925) 101.975,104.025 v1(101.975,120.55)
DOT46: T3.28 UDLDG6.13 | length 119.3
  Top Layer w0.5: UDLDG6.13@103.15,102.377 v1(103.15,104.1) ; v1@103.275,119.85 103.275,119.8 104.55,119.8 106.425,117.925 130.114,117.925 130.829,118.64 133.796,118.64 133.886,118.55 147.771,118.55 147.757,118.536 ; 147.761,118.54 161.96,118.54 162.575,117.925 192.1,117.925 192.625,118.45 196.927,118.45 198.21,119.733 198.21,122.545 T3.28@196.88,123.875
  Bottom Layer w0.5: v1(103.15,104.1) 103.25,104.2 v1(103.25,119.825)
DOT47: T2.28 UDLDG6.12 | length 46.8
  Top Layer w0.5: UDLDG6.12@104.42,102.377 v1@104.42,103.793
  Bottom Layer w0.5: v1(104.425,103.75) 104.425,106.525 106.15,108.25 108.825,108.25 111.15,110.575 111.15,117.15 111.95,117.95 129.05,117.95 130.438,119.338 132.163,119.338 132.83,120.005 132.83,123.05 T2.28@131.605,124.275
DOT48: T1.28 UDLDG6.11 | length 57.9
  Top Layer w0.5: T1.28@58.68,124.075 59.89,122.865 59.89,120.81 70.558,110.142 74.719,110.142 76.161,108.7 78.373,108.7 80.338,106.735 88.44,106.735 88.45,106.725 97.55,106.725 99.5,104.775 102.838,104.775 102.861,104.798 104.402,104.798 105.69,103.51 UDLDG6.11@105.69,102.377
DOT49: T1.9 UDLDG7.18 | length 58.7
  Top Layer w0.5: T1.9@61.22,121.535 61.22,120.78 71.16,110.84 75.035,110.84 76.45,109.425 78.725,109.425 80.717,107.433 88.842,107.433 88.85,107.425 98.1,107.425 99.975,105.55 104.637,105.55 106.237,103.95 110.65,103.95 110.825,103.775 UDLDG7.18@110.825,102.502
DOT50: T2.9 UDLDG7.17 | length 40.2
  Top Layer w0.5: UDLDG7.17@112.095,102.502 v1@112.095,104.047
  Bottom Layer w0.5: v1(112.1,104) 112.1,117.1 112.225,117.225 129.325,117.225 130.74,118.64 133.84,118.64 134.145,118.945 T2.9@134.145,121.735